# EAGLE board 9dof_block-Panel-v10 (EAGLE 6.6.0), part 1 of 4
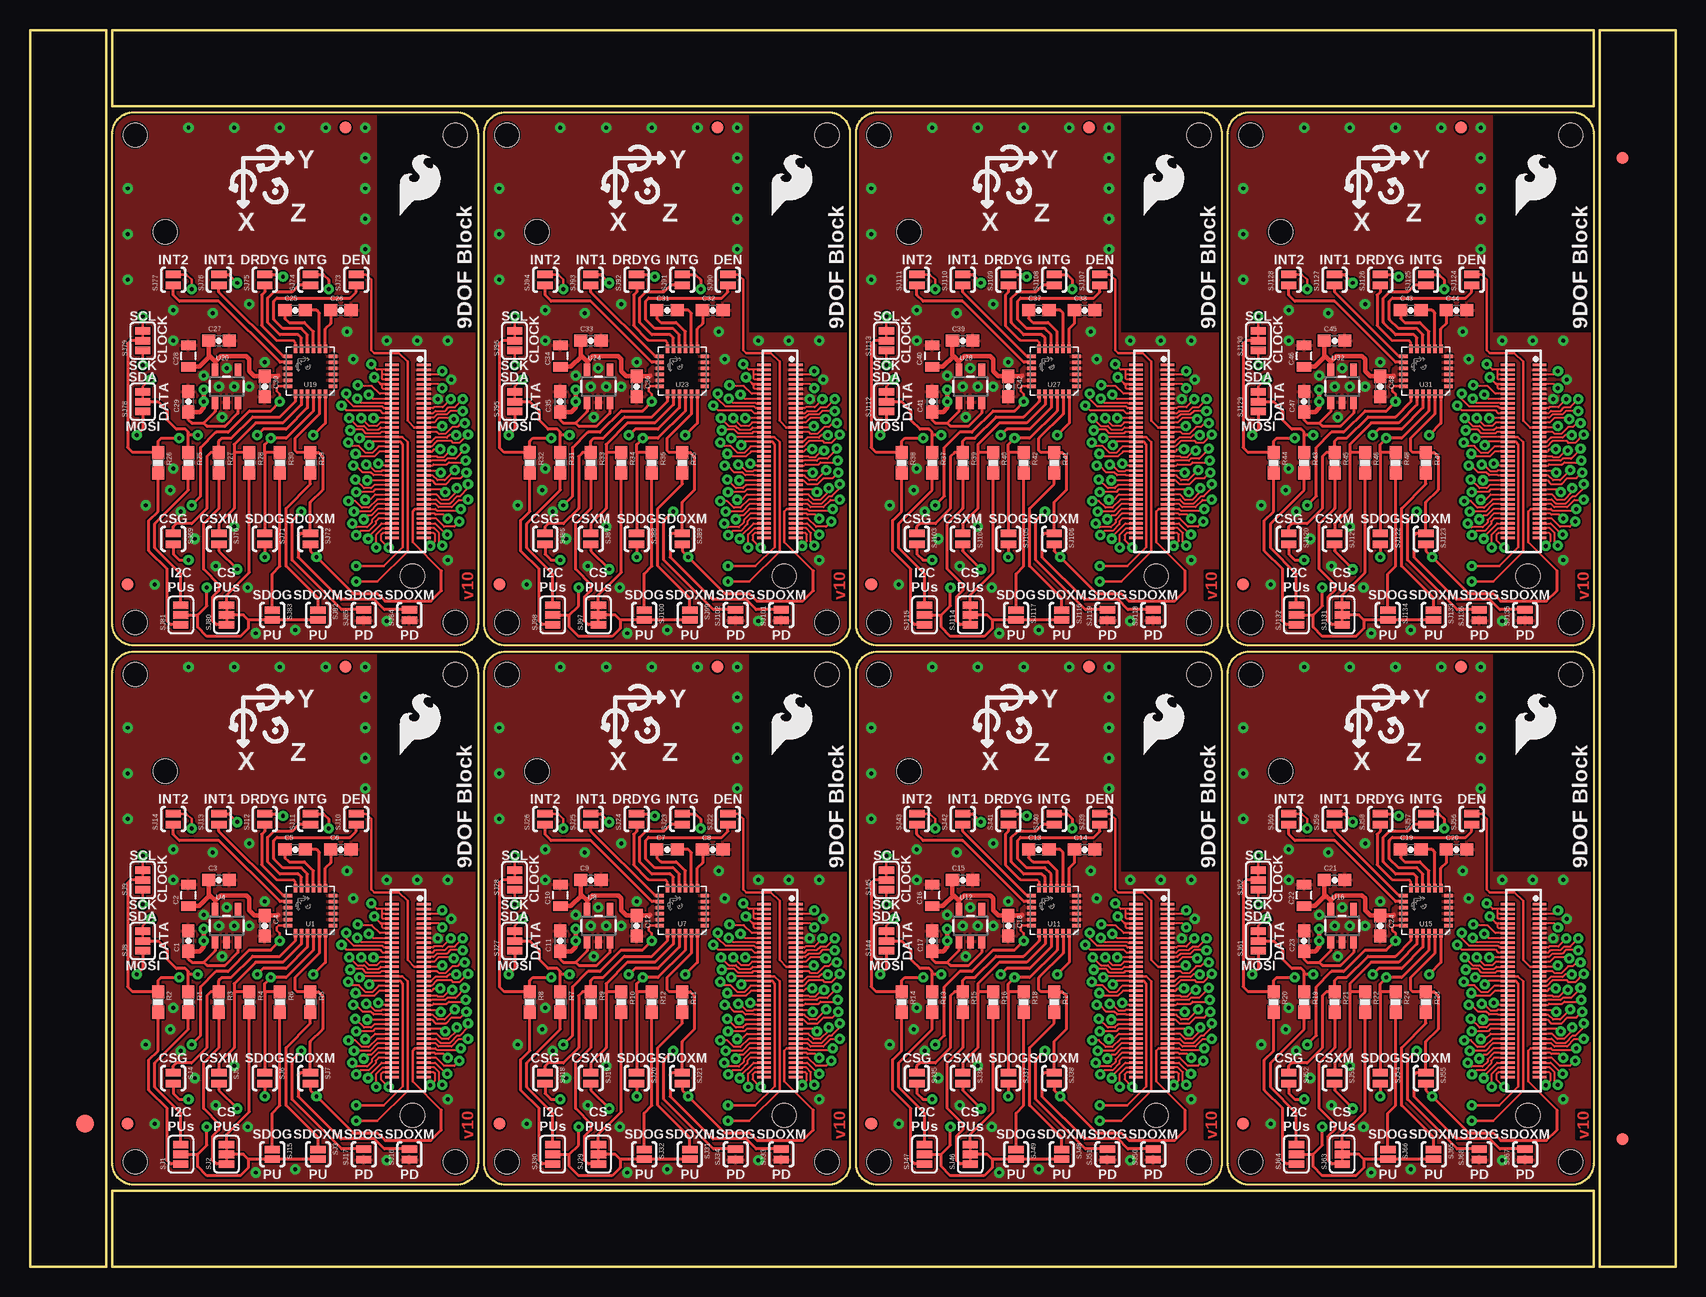
[diagram p0: board, top side]
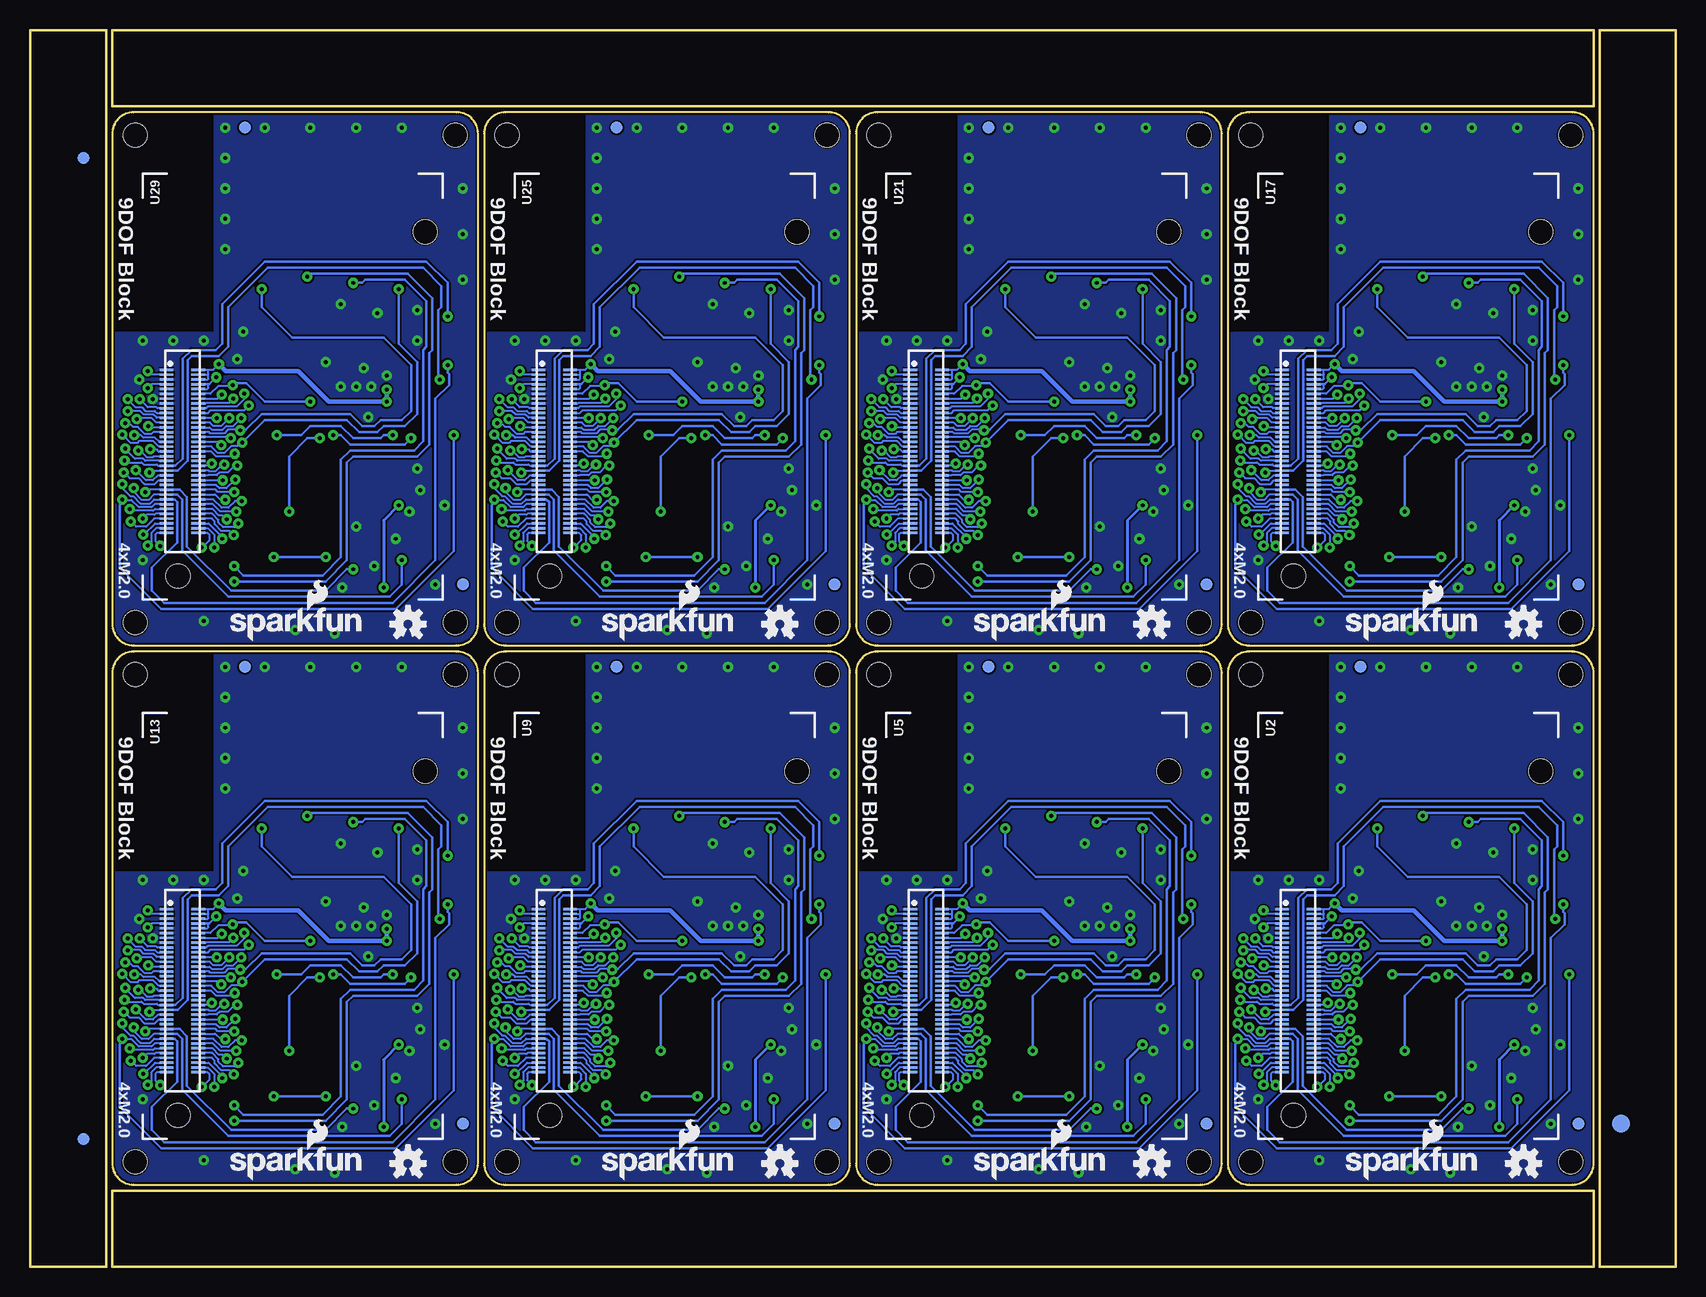
[diagram p1: board, bottom side, seen from below]

Size 137.16 x 103.12 mm. Coordinates in mm from the lower left corner, seen from the top.
Outline: 6.35,79.25 6.35,0 0,0 0,29.72
Outline: 137.16,79.25 137.16,0 130.81,0 130.81,29.72
Outline: 130.81,23.88 130.81,103.12 137.16,103.12 137.16,73.41
Outline: 0,23.88 0,103.12 6.35,103.12 6.35,73.41
Outline: 37.34,49.53 37.34,8.64 arc-90 35.56,6.86 8.64,6.86 arc-90 6.86,8.64 6.86,49.53 arc-90 8.64,51.31 35.56,51.31 arc-90 37.34,49.53
Outline: 68.33,49.53 68.33,8.64 arc-90 66.55,6.86 39.62,6.86 arc-90 37.85,8.64 37.85,49.53 arc-90 39.62,51.31 66.55,51.31 arc-90 68.33,49.53
Outline: 99.31,49.53 99.31,8.64 arc-90 97.54,6.86 70.61,6.86 arc-90 68.83,8.64 68.83,49.53 arc-90 70.61,51.31 97.54,51.31 arc-90 99.31,49.53
Outline: 130.3,49.53 130.3,8.64 arc-90 128.52,6.86 101.6,6.86 arc-90 99.82,8.64 99.82,49.53 arc-90 101.6,51.31 128.52,51.31 arc-90 130.3,49.53
Outline: 37.34,94.49 37.34,53.59 arc-90 35.56,51.82 8.64,51.82 arc-90 6.86,53.59 6.86,94.49 arc-90 8.64,96.27 35.56,96.27 arc-90 37.34,94.49
Outline: 68.33,94.49 68.33,53.59 arc-90 66.55,51.82 39.62,51.82 arc-90 37.85,53.59 37.85,94.49 arc-90 39.62,96.27 66.55,96.27 arc-90 68.33,94.49
Outline: 99.31,94.49 99.31,53.59 arc-90 97.54,51.82 70.61,51.82 arc-90 68.83,53.59 68.83,94.49 arc-90 70.61,96.27 97.54,96.27 arc-90 99.31,94.49
Outline: 130.3,94.49 130.3,53.59 arc-90 128.52,51.82 101.6,51.82 arc-90 99.82,53.59 99.82,94.49 arc-90 101.6,96.27 128.52,96.27 arc-90 130.3,94.49
Outline: 6.86,0 130.3,0 130.3,6.35 6.86,6.35 6.86,0
Outline: 130.3,103.12 6.86,103.12 6.86,96.77 130.3,96.77 130.3,103.12
Copper layers (1*16): Top 0.035mm / dielectric 1.5mm / Bottom 0.035mm
Design rules "SparkFun-2-layer *": minimum track width 6mil, minimum drill 13mil, track to track 6mil, track to pad 6mil, pad to pad 6mil, via to via 6mil, smd to smd 6mil, copper to edge 6mil, drill to drill 6mil, minimum pad ring 12mil, minimum via ring 10mil, stop-mask expansion 4mil, vias tented up to drill 20mil, thermal gap 6mil
Holes 2 mm at 35.43,8.76 8.76,8.76 8.76,49.4 35.43,49.4 66.42,8.76 39.75,8.76 39.75,49.4 66.42,49.4 97.41,8.76 70.74,8.76 70.74,49.4 97.41,49.4 128.4,8.76 101.73,8.76 101.73,49.4 128.4,49.4 35.43,53.72 8.76,53.72 8.76,94.36 35.43,94.36 66.42,53.72 39.75,53.72 39.75,94.36 66.42,94.36 97.41,53.72 70.74,53.72 70.74,94.36 97.41,94.36 128.4,53.72 101.73,53.72 101.73,94.36 128.4,94.36
tRestrict: area 29,33 to 37.3,51.3; area 22.1,28.4 to 24.6,31; area 59.9,33 to 68.3,51.3; area 53.1,28.4 to 55.6,31; area 90.9,33 to 99.3,51.3; area 84.1,28.4 to 86.6,31; area 121.9,33 to 130.3,51.3; area 115.1,28.4 to 117.6,31; area 29,78 to 37.3,96.3; area 22.1,73.4 to 24.6,75.9; area 59.9,78 to 68.3,96.3; area 53.1,73.4 to 55.6,75.9; area 90.9,78 to 99.3,96.3; area 84.1,73.4 to 86.6,75.9; area 121.9,78 to 130.3,96.3; area 115.1,73.4 to 117.6,75.9; 56 lines
bRestrict: area 29,33 to 37.3,51.3; area 59.9,33 to 68.3,51.3; area 90.9,33 to 99.3,51.3; area 121.9,33 to 130.3,51.3; area 29,78 to 37.3,96.3; area 59.9,78 to 68.3,96.3; area 90.9,78 to 99.3,96.3; area 121.9,78 to 130.3,96.3

## Footprints (pad centres in the part's own frame; a part is rotated, then mirrored left to right if it is on the bottom)
0603-CAP = smd 1.1 x 1: 1 -0.85,0; 2 0.85,0
0805 = smd 0.8 x 1.2: 1 -0.9,0; 2 0.9,0
FIDUCIAL-1.5X3 = smd 1.5 x 1.5: 1 0,0
FIDUCIAL-1X2 = smd 1 x 1: 1 0,0
0603-RES = smd 1.1 x 1: 1 -0.85,0; 2 0.85,0
PAD-JUMPER-3-NO_YES_SILK = smd 0.635 x 1.27: 1 -0.813,0; 2 0,0; 3 0.813,0
PAD-JUMPER-3-3OF3_NC_BY_TRACE_YES_SILK_FULL_BOX = smd 0.635 x 1.27: 1 -0.813,0; 2 0,0; 3 0.813,0
PAD-JUMPER-2-NC_BY_PASTE_YES_SILK = smd 0.635 x 1.27: 1 -0.401,0; 2 0.413,0
PAD-JUMPER-2-NO_YES_SILK = smd 0.635 x 1.27: 1 -0.45,0; 2 0.45,0
PAD-JUMPER-3-2OF3_NC_BY_TRACE_YES_SILK_FULL_BOX = smd 0.635 x 1.27: 1 -0.813,0; 2 0,0; 3 0.813,0
LGA-24 = smd 0.7 x 0.29: 1 -1.875,1.25; 2 -1.875,0.75; 3 -1.875,0.25; 4 -1.875,-0.25; 5 -1.875,-0.75; 6 -1.875,-1.25; 13 1.875,-1.25; 14 1.875,-0.75; 15 1.875,-0.25; 16 1.875,0.25; 17 1.875,0.75; 18 1.875,1.25 | smd 0.29 x 0.7: 7 -1.25,-1.875; 8 -0.75,-1.875; 9 -0.25,-1.875; 10 0.25,-1.875; 11 0.75,-1.875; 12 1.25,-1.875; 19 1.25,1.875; 20 0.75,1.875; 21 0.25,1.875; 22 -0.25,1.875; 23 -0.75,1.875; 24 -1.25,1.875
EDISON_DAUGHTER = smd 1.14 x 0.2: 1 1.98,19.17; 2 4.62,19.17; 3 1.98,18.77; 4 4.62,18.77; 5 1.98,18.37; 6 4.62,18.37; 7 1.98,17.97; 8 4.62,17.97; 9 1.98,17.57; 10 4.62,17.57; 11 1.98,17.17; 12 4.62,17.17; 13 1.98,16.77; 14 4.62,16.77; 15 1.98,16.37; 16 4.62,16.37; 17 1.98,15.97; 18 4.62,15.97; 19 1.98,15.57; 20 4.62,15.57; 21 1.98,15.17; 22 4.62,15.17; 23 1.98,14.77; 24 4.62,14.77; 25 1.98,14.37; 26 4.62,14.37; 27 1.98,13.97; 28 4.62,13.97; 29 1.98,13.57; 30 4.62,13.57; 31 1.98,13.17; 32 4.62,13.17; 33 1.98,12.77; 34 4.62,12.77; 35 1.98,12.37; 36 4.62,12.37; 37 1.98,11.97; 38 4.62,11.97; 39 1.98,11.57; 40 4.62,11.57; 41 1.98,11.17; 42 4.62,11.17; 43 1.98,10.77; 44 4.62,10.77; 45 1.98,10.37; 46 4.62,10.37; 47 1.98,9.97; 48 4.62,9.97; 49 1.98,9.57; 50 4.62,9.57; 51 1.98,9.17; 52 4.62,9.17; 53 1.98,8.77; 54 4.62,8.77; 55 1.98,8.37; 56 4.62,8.37; 57 1.98,7.97; 58 4.62,7.97; 59 1.98,7.57; 60 4.62,7.57; 61 1.98,7.17; 62 4.62,7.17; 63 1.98,6.77; 64 4.62,6.77; 65 1.98,6.37; 66 4.62,6.37; 67 1.98,5.97; 68 4.62,5.97; 69 1.98,5.57; 70 4.62,5.57 | hole 2: 23.53,30.67; 2.93,1.98
DF40C-70DP-0.4(51) = smd 0.2 x 1.14 bottom: 1 6.8,1.32; 2 6.8,-1.32; 3 6.4,1.32; 4 6.4,-1.32; 5 6,1.32; 6 6,-1.32; 7 5.6,1.32; 8 5.6,-1.32; 9 5.2,1.32; 10 5.2,-1.32; 11 4.8,1.32; 12 4.8,-1.32; 13 4.4,1.32; 14 4.4,-1.32; 15 4,1.32; 16 4,-1.32; 17 3.6,1.32; 18 3.6,-1.32; 19 3.2,1.32; 20 3.2,-1.32; 21 2.8,1.32; 22 2.8,-1.32; 23 2.4,1.32; 24 2.4,-1.32; 25 2,1.32; 26 2,-1.32; 27 1.6,1.32; 28 1.6,-1.32; 29 1.2,1.32; 30 1.2,-1.32; 31 0.8,1.32; 32 0.8,-1.32; 33 0.4,1.32; 34 0.4,-1.32; 35 0,1.32; 36 0,-1.32; 37 -0.4,1.32; 38 -0.4,-1.32; 39 -0.8,1.32; 40 -0.8,-1.32; 41 -1.2,1.32; 42 -1.2,-1.32; 43 -1.6,1.32; 44 -1.6,-1.32; 45 -2,1.32; 46 -2,-1.32; 47 -2.4,1.32; 48 -2.4,-1.32; 49 -2.8,1.32; 50 -2.8,-1.32; 51 -3.2,1.32; 52 -3.2,-1.32; 53 -3.6,1.32; 54 -3.6,-1.32; 55 -4,1.32; 56 -4,-1.32; 57 -4.4,1.32; 58 -4.4,-1.32; 59 -4.8,1.32; 60 -4.8,-1.32; 61 -5.2,1.32; 62 -5.2,-1.32; 63 -5.6,1.32; 64 -5.6,-1.32; 65 -6,1.32; 66 -6,-1.32; 67 -6.4,1.32; 68 -6.4,-1.32; 69 -6.8,1.32; 70 -6.8,-1.32; NC1 7.2,1.32; NC2 7.2,-1.32; NC3 -7.2,-1.32; NC4 -7.2,1.32
SOT23-5 = smd 0.55 x 1.2: 1 -0.95,-1.3; 2 0,-1.3; 3 0.95,-1.3; 4 0.95,1.3; 5 -0.95,1.3

## Placement (x,y rotation side)
C1  1.0uF  [0603-CAP]  13.21,27.18 90 top
C2  10uF  [0805]  13.21,30.99 90 top
C3  1.0uF  [0603-CAP]  15.75,32.26 0 top
C4  0.1uF  [0603-CAP]  19.56,28.45 270 top
C5  0.22uF  [0603-CAP]  22.1,34.8 0 top
C6  4.7uF  [0603-CAP]  25.91,34.8 0 top
C7  0.22uF  [0603-CAP]  53.09,34.8 0 top
C8  4.7uF  [0603-CAP]  56.9,34.8 0 top
C9  1.0uF  [0603-CAP]  46.74,32.26 0 top
C10  10uF  [0805]  44.2,30.99 90 top
C11  1.0uF  [0603-CAP]  44.2,27.18 90 top
C12  0.1uF  [0603-CAP]  50.55,28.45 270 top
C13  0.22uF  [0603-CAP]  84.07,34.8 0 top
C14  4.7uF  [0603-CAP]  87.88,34.8 0 top
C15  1.0uF  [0603-CAP]  77.72,32.26 0 top
C16  10uF  [0805]  75.18,30.99 90 top
C17  1.0uF  [0603-CAP]  75.18,27.18 90 top
C18  0.1uF  [0603-CAP]  81.53,28.45 270 top
C19  0.22uF  [0603-CAP]  115.06,34.8 0 top
C20  4.7uF  [0603-CAP]  118.87,34.8 0 top
C21  1.0uF  [0603-CAP]  108.71,32.26 0 top
C22  10uF  [0805]  106.17,30.99 90 top
C23  1.0uF  [0603-CAP]  106.17,27.18 90 top
C24  0.1uF  [0603-CAP]  112.52,28.45 270 top
C25  0.22uF  [0603-CAP]  22.1,79.76 0 top
C26  4.7uF  [0603-CAP]  25.91,79.76 0 top
C27  1.0uF  [0603-CAP]  15.75,77.22 0 top
C28  10uF  [0805]  13.21,75.95 90 top
C29  1.0uF  [0603-CAP]  13.21,72.14 90 top
C30  0.1uF  [0603-CAP]  19.56,73.41 270 top
C31  0.22uF  [0603-CAP]  53.09,79.76 0 top
C32  4.7uF  [0603-CAP]  56.9,79.76 0 top
C33  1.0uF  [0603-CAP]  46.74,77.22 0 top
C34  10uF  [0805]  44.2,75.95 90 top
C35  1.0uF  [0603-CAP]  44.2,72.14 90 top
C36  0.1uF  [0603-CAP]  50.55,73.41 270 top
C37  0.22uF  [0603-CAP]  84.07,79.76 0 top
C38  4.7uF  [0603-CAP]  87.88,79.76 0 top
C39  1.0uF  [0603-CAP]  77.72,77.22 0 top
C40  10uF  [0805]  75.18,75.95 90 top
C41  1.0uF  [0603-CAP]  75.18,72.14 90 top
C42  0.1uF  [0603-CAP]  81.53,73.41 270 top
C43  0.22uF  [0603-CAP]  115.06,79.76 0 top
C44  4.7uF  [0603-CAP]  118.87,79.76 0 top
C45  1.0uF  [0603-CAP]  108.71,77.22 0 top
C46  10uF  [0805]  106.17,75.95 90 top
C47  1.0uF  [0603-CAP]  106.17,72.14 90 top
C48  0.1uF  [0603-CAP]  112.52,73.41 270 top
E$1  [FIDUCIAL-1.5X3]  4.57,11.94 0 top
E$2  [FIDUCIAL-1.5X3]  4.57,11.94 0 bottom
E$3  [FIDUCIAL-1X2]  132.72,92.46 180 bottom
E$4  [FIDUCIAL-1X2]  132.72,10.67 0 top
E$5  [FIDUCIAL-1X2]  132.72,92.46 180 top
E$6  [FIDUCIAL-1X2]  132.72,10.67 0 bottom
FID1  FIDUCIAL1X2  [FIDUCIAL-1X2]  8.13,11.94 0 top
FID2  FIDUCIAL1X2  [FIDUCIAL-1X2]  26.29,50.04 0 top
FID3  FIDUCIAL1X2  [FIDUCIAL-1X2]  26.29,50.04 0 bottom
FID4  FIDUCIAL1X2  [FIDUCIAL-1X2]  8.13,11.94 0 bottom
FID5  FIDUCIAL1X2  [FIDUCIAL-1X2]  39.12,11.94 0 top
FID6  FIDUCIAL1X2  [FIDUCIAL-1X2]  57.28,50.04 0 top
FID7  FIDUCIAL1X2  [FIDUCIAL-1X2]  57.28,50.04 0 bottom
FID8  FIDUCIAL1X2  [FIDUCIAL-1X2]  39.12,11.94 0 bottom
FID9  FIDUCIAL1X2  [FIDUCIAL-1X2]  70.1,11.94 0 top
FID10  FIDUCIAL1X2  [FIDUCIAL-1X2]  88.27,50.04 0 top
FID11  FIDUCIAL1X2  [FIDUCIAL-1X2]  88.27,50.04 0 bottom
FID12  FIDUCIAL1X2  [FIDUCIAL-1X2]  70.1,11.94 0 bottom
FID13  FIDUCIAL1X2  [FIDUCIAL-1X2]  101.09,11.94 0 top
FID14  FIDUCIAL1X2  [FIDUCIAL-1X2]  119.25,50.04 0 top
FID15  FIDUCIAL1X2  [FIDUCIAL-1X2]  119.25,50.04 0 bottom
FID16  FIDUCIAL1X2  [FIDUCIAL-1X2]  101.09,11.94 0 bottom
FID17  FIDUCIAL1X2  [FIDUCIAL-1X2]  8.13,56.9 0 top
FID18  FIDUCIAL1X2  [FIDUCIAL-1X2]  26.29,95 0 top
FID19  FIDUCIAL1X2  [FIDUCIAL-1X2]  26.29,95 0 bottom
FID20  FIDUCIAL1X2  [FIDUCIAL-1X2]  8.13,56.9 0 bottom
FID21  FIDUCIAL1X2  [FIDUCIAL-1X2]  39.12,56.9 0 top
FID22  FIDUCIAL1X2  [FIDUCIAL-1X2]  57.28,95 0 top
FID23  FIDUCIAL1X2  [FIDUCIAL-1X2]  57.28,95 0 bottom
FID24  FIDUCIAL1X2  [FIDUCIAL-1X2]  39.12,56.9 0 bottom
FID25  FIDUCIAL1X2  [FIDUCIAL-1X2]  70.1,56.9 0 top
FID26  FIDUCIAL1X2  [FIDUCIAL-1X2]  88.27,95 0 top
FID27  FIDUCIAL1X2  [FIDUCIAL-1X2]  88.27,95 0 bottom
FID28  FIDUCIAL1X2  [FIDUCIAL-1X2]  70.1,56.9 0 bottom
FID29  FIDUCIAL1X2  [FIDUCIAL-1X2]  101.09,56.9 0 top
FID30  FIDUCIAL1X2  [FIDUCIAL-1X2]  119.25,95 0 top
FID31  FIDUCIAL1X2  [FIDUCIAL-1X2]  119.25,95 0 bottom
FID32  FIDUCIAL1X2  [FIDUCIAL-1X2]  101.09,56.9 0 bottom
LOGO1  SFE_LOGO_FLAME.2_INCH  [SFE_LOGO_FLAME_.2]  30.48,42.42 0 top
LOGO2  OSHW-LOGOS  [OSHW-LOGO-S]  12.7,8.64 0 bottom
LOGO3  SFE_LOGO_NAME_FLAME.1_INCH  [SFE_LOGO_NAME_FLAME_.1]  27.94,7.11 0 bottom
LOGO4  OSHW-LOGOS  [OSHW-LOGO-S]  43.69,8.64 0 bottom
LOGO5  SFE_LOGO_NAME_FLAME.1_INCH  [SFE_LOGO_NAME_FLAME_.1]  58.93,7.11 0 bottom
LOGO6  SFE_LOGO_FLAME.2_INCH  [SFE_LOGO_FLAME_.2]  61.47,42.42 0 top
LOGO7  OSHW-LOGOS  [OSHW-LOGO-S]  74.68,8.64 0 bottom
LOGO8  SFE_LOGO_NAME_FLAME.1_INCH  [SFE_LOGO_NAME_FLAME_.1]  89.92,7.11 0 bottom
LOGO9  SFE_LOGO_FLAME.2_INCH  [SFE_LOGO_FLAME_.2]  92.46,42.42 0 top
LOGO10  OSHW-LOGOS  [OSHW-LOGO-S]  105.66,8.64 0 bottom
LOGO11  SFE_LOGO_NAME_FLAME.1_INCH  [SFE_LOGO_NAME_FLAME_.1]  120.9,7.11 0 bottom
LOGO12  SFE_LOGO_FLAME.2_INCH  [SFE_LOGO_FLAME_.2]  123.44,42.42 0 top
LOGO13  OSHW-LOGOS  [OSHW-LOGO-S]  12.7,53.59 0 bottom
LOGO14  SFE_LOGO_NAME_FLAME.1_INCH  [SFE_LOGO_NAME_FLAME_.1]  27.94,52.07 0 bottom
LOGO15  SFE_LOGO_FLAME.2_INCH  [SFE_LOGO_FLAME_.2]  30.48,87.38 0 top
LOGO16  OSHW-LOGOS  [OSHW-LOGO-S]  43.69,53.59 0 bottom
LOGO17  SFE_LOGO_NAME_FLAME.1_INCH  [SFE_LOGO_NAME_FLAME_.1]  58.93,52.07 0 bottom
LOGO18  SFE_LOGO_FLAME.2_INCH  [SFE_LOGO_FLAME_.2]  61.47,87.38 0 top
LOGO19  OSHW-LOGOS  [OSHW-LOGO-S]  74.68,53.59 0 bottom
LOGO20  SFE_LOGO_NAME_FLAME.1_INCH  [SFE_LOGO_NAME_FLAME_.1]  89.92,52.07 0 bottom
LOGO21  SFE_LOGO_FLAME.2_INCH  [SFE_LOGO_FLAME_.2]  92.46,87.38 0 top
LOGO22  OSHW-LOGOS  [OSHW-LOGO-S]  105.66,53.59 0 bottom
LOGO23  SFE_LOGO_NAME_FLAME.1_INCH  [SFE_LOGO_NAME_FLAME_.1]  120.9,52.07 0 bottom
LOGO24  SFE_LOGO_FLAME.2_INCH  [SFE_LOGO_FLAME_.2]  123.44,87.38 0 top
R1  10K  [0603-RES]  13.21,22.1 270 top
R2  10K  [0603-RES]  10.67,22.1 270 top
R3  10k  [0603-RES]  15.75,22.1 270 top
R4  10k  [0603-RES]  18.29,22.1 270 top
R5  10k  [0603-RES]  23.37,22.1 270 top
R6  10k  [0603-RES]  20.83,22.1 270 top
R7  10K  [0603-RES]  44.2,22.1 270 top
R8  10K  [0603-RES]  41.66,22.1 270 top
R9  10k  [0603-RES]  46.74,22.1 270 top
R10  10k  [0603-RES]  49.28,22.1 270 top
R11  10k  [0603-RES]  54.36,22.1 270 top
R12  10k  [0603-RES]  51.82,22.1 270 top
R13  10K  [0603-RES]  75.18,22.1 270 top
R14  10K  [0603-RES]  72.64,22.1 270 top
R15  10k  [0603-RES]  77.72,22.1 270 top
R16  10k  [0603-RES]  80.26,22.1 270 top
R17  10k  [0603-RES]  85.34,22.1 270 top
R18  10k  [0603-RES]  82.8,22.1 270 top
R19  10K  [0603-RES]  106.17,22.1 270 top
R20  10K  [0603-RES]  103.63,22.1 270 top
R21  10k  [0603-RES]  108.71,22.1 270 top
R22  10k  [0603-RES]  111.25,22.1 270 top
R23  10k  [0603-RES]  116.33,22.1 270 top
R24  10k  [0603-RES]  113.79,22.1 270 top
R25  10K  [0603-RES]  13.21,67.06 270 top
R26  10K  [0603-RES]  10.67,67.06 270 top
R27  10k  [0603-RES]  15.75,67.06 270 top
R28  10k  [0603-RES]  18.29,67.06 270 top
R29  10k  [0603-RES]  23.37,67.06 270 top
R30  10k  [0603-RES]  20.83,67.06 270 top
R31  10K  [0603-RES]  44.2,67.06 270 top
R32  10K  [0603-RES]  41.66,67.06 270 top
R33  10k  [0603-RES]  46.74,67.06 270 top
R34  10k  [0603-RES]  49.28,67.06 270 top
R35  10k  [0603-RES]  54.36,67.06 270 top
R36  10k  [0603-RES]  51.82,67.06 270 top
R37  10K  [0603-RES]  75.18,67.06 270 top
R38  10K  [0603-RES]  72.64,67.06 270 top
R39  10k  [0603-RES]  77.72,67.06 270 top
R40  10k  [0603-RES]  80.26,67.06 270 top
R41  10k  [0603-RES]  85.34,67.06 270 top
R42  10k  [0603-RES]  82.8,67.06 270 top
R43  10K  [0603-RES]  106.17,67.06 270 top
R44  10K  [0603-RES]  103.63,67.06 270 top
R45  10k  [0603-RES]  108.71,67.06 270 top
R46  10k  [0603-RES]  111.25,67.06 270 top
R47  10k  [0603-RES]  116.33,67.06 270 top
R48  10k  [0603-RES]  113.79,67.06 270 top
SJ1  JUMPER-PAD-3-NOYES_SILK  [PAD-JUMPER-3-NO_YES_SILK]  12.57,9.4 90 top
SJ2  [PAD-JUMPER-3-3OF3_NC_BY_TRACE_YES_SILK_FULL_BOX]  16.38,9.4 90 top
SJ3  JUMPER-PAD-2-NC_BY_PASTE  [PAD-JUMPER-2-NC_BY_PASTE_YES_SILK]  24,9.4 270 top
SJ4  JUMPER-PAD-2-NOYES_SILK  [PAD-JUMPER-2-NO_YES_SILK]  11.94,15.75 270 top
SJ5  JUMPER-PAD-2-NOYES_SILK  [PAD-JUMPER-2-NO_YES_SILK]  15.75,15.75 270 top
SJ6  JUMPER-PAD-2-NOYES_SILK  [PAD-JUMPER-2-NO_YES_SILK]  19.56,15.75 270 top
SJ7  JUMPER-PAD-2-NOYES_SILK  [PAD-JUMPER-2-NO_YES_SILK]  23.37,15.75 270 top
SJ8  JUMPER-PAD-3-2OF3_NC_BY_TRACE_SMALL  [PAD-JUMPER-3-2OF3_NC_BY_TRACE_YES_SILK_FULL_BOX]  9.4,27.18 90 top
SJ9  JUMPER-PAD-3-2OF3_NC_BY_TRACE_SMALL  [PAD-JUMPER-3-2OF3_NC_BY_TRACE_YES_SILK_FULL_BOX]  9.4,32.26 90 top
SJ10  JUMPER-PAD-2-NOYES_SILK  [PAD-JUMPER-2-NO_YES_SILK]  27.18,37.34 90 top
SJ11  JUMPER-PAD-2-NOYES_SILK  [PAD-JUMPER-2-NO_YES_SILK]  23.37,37.34 90 top
SJ12  JUMPER-PAD-2-NOYES_SILK  [PAD-JUMPER-2-NO_YES_SILK]  19.56,37.34 90 top
SJ13  JUMPER-PAD-2-NOYES_SILK  [PAD-JUMPER-2-NO_YES_SILK]  15.75,37.34 90 top
SJ14  JUMPER-PAD-2-NOYES_SILK  [PAD-JUMPER-2-NO_YES_SILK]  11.94,37.34 90 top
SJ15  JUMPER-PAD-2-NC_BY_PASTE  [PAD-JUMPER-2-NC_BY_PASTE_YES_SILK]  20.19,9.4 270 top
SJ16  JUMPER-PAD-2-NOYES_SILK  [PAD-JUMPER-2-NO_YES_SILK]  31.62,9.4 90 top
SJ17  JUMPER-PAD-2-NOYES_SILK  [PAD-JUMPER-2-NO_YES_SILK]  27.81,9.4 90 top
SJ18  JUMPER-PAD-2-NOYES_SILK  [PAD-JUMPER-2-NO_YES_SILK]  42.93,15.75 270 top
SJ19  JUMPER-PAD-2-NOYES_SILK  [PAD-JUMPER-2-NO_YES_SILK]  46.74,15.75 270 top
SJ20  JUMPER-PAD-2-NOYES_SILK  [PAD-JUMPER-2-NO_YES_SILK]  50.55,15.75 270 top
SJ21  JUMPER-PAD-2-NOYES_SILK  [PAD-JUMPER-2-NO_YES_SILK]  54.36,15.75 270 top
SJ22  JUMPER-PAD-2-NOYES_SILK  [PAD-JUMPER-2-NO_YES_SILK]  58.17,37.34 90 top
SJ23  JUMPER-PAD-2-NOYES_SILK  [PAD-JUMPER-2-NO_YES_SILK]  54.36,37.34 90 top
SJ24  JUMPER-PAD-2-NOYES_SILK  [PAD-JUMPER-2-NO_YES_SILK]  50.55,37.34 90 top
SJ25  JUMPER-PAD-2-NOYES_SILK  [PAD-JUMPER-2-NO_YES_SILK]  46.74,37.34 90 top
SJ26  JUMPER-PAD-2-NOYES_SILK  [PAD-JUMPER-2-NO_YES_SILK]  42.93,37.34 90 top
SJ27  JUMPER-PAD-3-2OF3_NC_BY_TRACE_SMALL  [PAD-JUMPER-3-2OF3_NC_BY_TRACE_YES_SILK_FULL_BOX]  40.39,27.18 90 top
SJ28  JUMPER-PAD-3-2OF3_NC_BY_TRACE_SMALL  [PAD-JUMPER-3-2OF3_NC_BY_TRACE_YES_SILK_FULL_BOX]  40.39,32.26 90 top
SJ29  [PAD-JUMPER-3-3OF3_NC_BY_TRACE_YES_SILK_FULL_BOX]  47.37,9.4 90 top
SJ30  JUMPER-PAD-3-NOYES_SILK  [PAD-JUMPER-3-NO_YES_SILK]  43.56,9.4 90 top
SJ31  JUMPER-PAD-2-NC_BY_PASTE  [PAD-JUMPER-2-NC_BY_PASTE_YES_SILK]  54.99,9.4 270 top
SJ32  JUMPER-PAD-2-NC_BY_PASTE  [PAD-JUMPER-2-NC_BY_PASTE_YES_SILK]  51.18,9.4 270 top
SJ33  JUMPER-PAD-2-NOYES_SILK  [PAD-JUMPER-2-NO_YES_SILK]  62.61,9.4 90 top
SJ34  JUMPER-PAD-2-NOYES_SILK  [PAD-JUMPER-2-NO_YES_SILK]  58.8,9.4 90 top
SJ35  JUMPER-PAD-2-NOYES_SILK  [PAD-JUMPER-2-NO_YES_SILK]  73.91,15.75 270 top
SJ36  JUMPER-PAD-2-NOYES_SILK  [PAD-JUMPER-2-NO_YES_SILK]  77.72,15.75 270 top
SJ37  JUMPER-PAD-2-NOYES_SILK  [PAD-JUMPER-2-NO_YES_SILK]  81.53,15.75 270 top
SJ38  JUMPER-PAD-2-NOYES_SILK  [PAD-JUMPER-2-NO_YES_SILK]  85.34,15.75 270 top
SJ39  JUMPER-PAD-2-NOYES_SILK  [PAD-JUMPER-2-NO_YES_SILK]  89.15,37.34 90 top
SJ40  JUMPER-PAD-2-NOYES_SILK  [PAD-JUMPER-2-NO_YES_SILK]  85.34,37.34 90 top
SJ41  JUMPER-PAD-2-NOYES_SILK  [PAD-JUMPER-2-NO_YES_SILK]  81.53,37.34 90 top
SJ42  JUMPER-PAD-2-NOYES_SILK  [PAD-JUMPER-2-NO_YES_SILK]  77.72,37.34 90 top
SJ43  JUMPER-PAD-2-NOYES_SILK  [PAD-JUMPER-2-NO_YES_SILK]  73.91,37.34 90 top
SJ44  JUMPER-PAD-3-2OF3_NC_BY_TRACE_SMALL  [PAD-JUMPER-3-2OF3_NC_BY_TRACE_YES_SILK_FULL_BOX]  71.37,27.18 90 top
SJ45  JUMPER-PAD-3-2OF3_NC_BY_TRACE_SMALL  [PAD-JUMPER-3-2OF3_NC_BY_TRACE_YES_SILK_FULL_BOX]  71.37,32.26 90 top
SJ46  [PAD-JUMPER-3-3OF3_NC_BY_TRACE_YES_SILK_FULL_BOX]  78.36,9.4 90 top
SJ47  JUMPER-PAD-3-NOYES_SILK  [PAD-JUMPER-3-NO_YES_SILK]  74.55,9.4 90 top
SJ48  JUMPER-PAD-2-NC_BY_PASTE  [PAD-JUMPER-2-NC_BY_PASTE_YES_SILK]  85.98,9.4 270 top
SJ49  JUMPER-PAD-2-NC_BY_PASTE  [PAD-JUMPER-2-NC_BY_PASTE_YES_SILK]  82.17,9.4 270 top
SJ50  JUMPER-PAD-2-NOYES_SILK  [PAD-JUMPER-2-NO_YES_SILK]  93.6,9.4 90 top
SJ51  JUMPER-PAD-2-NOYES_SILK  [PAD-JUMPER-2-NO_YES_SILK]  89.79,9.4 90 top
SJ52  JUMPER-PAD-2-NOYES_SILK  [PAD-JUMPER-2-NO_YES_SILK]  104.9,15.75 270 top
SJ53  JUMPER-PAD-2-NOYES_SILK  [PAD-JUMPER-2-NO_YES_SILK]  108.71,15.75 270 top
SJ54  JUMPER-PAD-2-NOYES_SILK  [PAD-JUMPER-2-NO_YES_SILK]  112.52,15.75 270 top
SJ55  JUMPER-PAD-2-NOYES_SILK  [PAD-JUMPER-2-NO_YES_SILK]  116.33,15.75 270 top
SJ56  JUMPER-PAD-2-NOYES_SILK  [PAD-JUMPER-2-NO_YES_SILK]  120.14,37.34 90 top
SJ57  JUMPER-PAD-2-NOYES_SILK  [PAD-JUMPER-2-NO_YES_SILK]  116.33,37.34 90 top
SJ58  JUMPER-PAD-2-NOYES_SILK  [PAD-JUMPER-2-NO_YES_SILK]  112.52,37.34 90 top
SJ59  JUMPER-PAD-2-NOYES_SILK  [PAD-JUMPER-2-NO_YES_SILK]  108.71,37.34 90 top
SJ60  JUMPER-PAD-2-NOYES_SILK  [PAD-JUMPER-2-NO_YES_SILK]  104.9,37.34 90 top
SJ61  JUMPER-PAD-3-2OF3_NC_BY_TRACE_SMALL  [PAD-JUMPER-3-2OF3_NC_BY_TRACE_YES_SILK_FULL_BOX]  102.36,27.18 90 top
SJ62  JUMPER-PAD-3-2OF3_NC_BY_TRACE_SMALL  [PAD-JUMPER-3-2OF3_NC_BY_TRACE_YES_SILK_FULL_BOX]  102.36,32.26 90 top
SJ63  [PAD-JUMPER-3-3OF3_NC_BY_TRACE_YES_SILK_FULL_BOX]  109.35,9.4 90 top
SJ64  JUMPER-PAD-3-NOYES_SILK  [PAD-JUMPER-3-NO_YES_SILK]  105.54,9.4 90 top
SJ65  JUMPER-PAD-2-NC_BY_PASTE  [PAD-JUMPER-2-NC_BY_PASTE_YES_SILK]  116.97,9.4 270 top
SJ66  JUMPER-PAD-2-NC_BY_PASTE  [PAD-JUMPER-2-NC_BY_PASTE_YES_SILK]  113.16,9.4 270 top
SJ67  JUMPER-PAD-2-NOYES_SILK  [PAD-JUMPER-2-NO_YES_SILK]  124.59,9.4 90 top
SJ68  JUMPER-PAD-2-NOYES_SILK  [PAD-JUMPER-2-NO_YES_SILK]  120.78,9.4 90 top
SJ69  JUMPER-PAD-2-NOYES_SILK  [PAD-JUMPER-2-NO_YES_SILK]  11.94,60.71 270 top
SJ70  JUMPER-PAD-2-NOYES_SILK  [PAD-JUMPER-2-NO_YES_SILK]  15.75,60.71 270 top
SJ71  JUMPER-PAD-2-NOYES_SILK  [PAD-JUMPER-2-NO_YES_SILK]  19.56,60.71 270 top
SJ72  JUMPER-PAD-2-NOYES_SILK  [PAD-JUMPER-2-NO_YES_SILK]  23.37,60.71 270 top
SJ73  JUMPER-PAD-2-NOYES_SILK  [PAD-JUMPER-2-NO_YES_SILK]  27.18,82.3 90 top
SJ74  JUMPER-PAD-2-NOYES_SILK  [PAD-JUMPER-2-NO_YES_SILK]  23.37,82.3 90 top
SJ75  JUMPER-PAD-2-NOYES_SILK  [PAD-JUMPER-2-NO_YES_SILK]  19.56,82.3 90 top
SJ76  JUMPER-PAD-2-NOYES_SILK  [PAD-JUMPER-2-NO_YES_SILK]  15.75,82.3 90 top
SJ77  JUMPER-PAD-2-NOYES_SILK  [PAD-JUMPER-2-NO_YES_SILK]  11.94,82.3 90 top
SJ78  JUMPER-PAD-3-2OF3_NC_BY_TRACE_SMALL  [PAD-JUMPER-3-2OF3_NC_BY_TRACE_YES_SILK_FULL_BOX]  9.4,72.14 90 top
SJ79  JUMPER-PAD-3-2OF3_NC_BY_TRACE_SMALL  [PAD-JUMPER-3-2OF3_NC_BY_TRACE_YES_SILK_FULL_BOX]  9.4,77.22 90 top
SJ80  [PAD-JUMPER-3-3OF3_NC_BY_TRACE_YES_SILK_FULL_BOX]  16.38,54.36 90 top
SJ81  JUMPER-PAD-3-NOYES_SILK  [PAD-JUMPER-3-NO_YES_SILK]  12.57,54.36 90 top
SJ82  JUMPER-PAD-2-NC_BY_PASTE  [PAD-JUMPER-2-NC_BY_PASTE_YES_SILK]  24,54.36 270 top
SJ83  JUMPER-PAD-2-NC_BY_PASTE  [PAD-JUMPER-2-NC_BY_PASTE_YES_SILK]  20.19,54.36 270 top
SJ84  JUMPER-PAD-2-NOYES_SILK  [PAD-JUMPER-2-NO_YES_SILK]  31.62,54.36 90 top
SJ85  JUMPER-PAD-2-NOYES_SILK  [PAD-JUMPER-2-NO_YES_SILK]  27.81,54.36 90 top
SJ86  JUMPER-PAD-2-NOYES_SILK  [PAD-JUMPER-2-NO_YES_SILK]  42.93,60.71 270 top
SJ87  JUMPER-PAD-2-NOYES_SILK  [PAD-JUMPER-2-NO_YES_SILK]  46.74,60.71 270 top
SJ88  JUMPER-PAD-2-NOYES_SILK  [PAD-JUMPER-2-NO_YES_SILK]  50.55,60.71 270 top
SJ89  JUMPER-PAD-2-NOYES_SILK  [PAD-JUMPER-2-NO_YES_SILK]  54.36,60.71 270 top
SJ90  JUMPER-PAD-2-NOYES_SILK  [PAD-JUMPER-2-NO_YES_SILK]  58.17,82.3 90 top
SJ91  JUMPER-PAD-2-NOYES_SILK  [PAD-JUMPER-2-NO_YES_SILK]  54.36,82.3 90 top
SJ92  JUMPER-PAD-2-NOYES_SILK  [PAD-JUMPER-2-NO_YES_SILK]  50.55,82.3 90 top
SJ93  JUMPER-PAD-2-NOYES_SILK  [PAD-JUMPER-2-NO_YES_SILK]  46.74,82.3 90 top
SJ94  JUMPER-PAD-2-NOYES_SILK  [PAD-JUMPER-2-NO_YES_SILK]  42.93,82.3 90 top
SJ95  JUMPER-PAD-3-2OF3_NC_BY_TRACE_SMALL  [PAD-JUMPER-3-2OF3_NC_BY_TRACE_YES_SILK_FULL_BOX]  40.39,72.14 90 top
SJ96  JUMPER-PAD-3-2OF3_NC_BY_TRACE_SMALL  [PAD-JUMPER-3-2OF3_NC_BY_TRACE_YES_SILK_FULL_BOX]  40.39,77.22 90 top
SJ97  [PAD-JUMPER-3-3OF3_NC_BY_TRACE_YES_SILK_FULL_BOX]  47.37,54.36 90 top
SJ98  JUMPER-PAD-3-NOYES_SILK  [PAD-JUMPER-3-NO_YES_SILK]  43.56,54.36 90 top
SJ99  JUMPER-PAD-2-NC_BY_PASTE  [PAD-JUMPER-2-NC_BY_PASTE_YES_SILK]  54.99,54.36 270 top
SJ100  JUMPER-PAD-2-NC_BY_PASTE  [PAD-JUMPER-2-NC_BY_PASTE_YES_SILK]  51.18,54.36 270 top
SJ101  JUMPER-PAD-2-NOYES_SILK  [PAD-JUMPER-2-NO_YES_SILK]  62.61,54.36 90 top
SJ102  JUMPER-PAD-2-NOYES_SILK  [PAD-JUMPER-2-NO_YES_SILK]  58.8,54.36 90 top
SJ103  JUMPER-PAD-2-NOYES_SILK  [PAD-JUMPER-2-NO_YES_SILK]  73.91,60.71 270 top
SJ104  JUMPER-PAD-2-NOYES_SILK  [PAD-JUMPER-2-NO_YES_SILK]  77.72,60.71 270 top
SJ105  JUMPER-PAD-2-NOYES_SILK  [PAD-JUMPER-2-NO_YES_SILK]  81.53,60.71 270 top
SJ106  JUMPER-PAD-2-NOYES_SILK  [PAD-JUMPER-2-NO_YES_SILK]  85.34,60.71 270 top
SJ107  JUMPER-PAD-2-NOYES_SILK  [PAD-JUMPER-2-NO_YES_SILK]  89.15,82.3 90 top
SJ108  JUMPER-PAD-2-NOYES_SILK  [PAD-JUMPER-2-NO_YES_SILK]  85.34,82.3 90 top
SJ109  JUMPER-PAD-2-NOYES_SILK  [PAD-JUMPER-2-NO_YES_SILK]  81.53,82.3 90 top
SJ110  JUMPER-PAD-2-NOYES_SILK  [PAD-JUMPER-2-NO_YES_SILK]  77.72,82.3 90 top
SJ111  JUMPER-PAD-2-NOYES_SILK  [PAD-JUMPER-2-NO_YES_SILK]  73.91,82.3 90 top
SJ112  JUMPER-PAD-3-2OF3_NC_BY_TRACE_SMALL  [PAD-JUMPER-3-2OF3_NC_BY_TRACE_YES_SILK_FULL_BOX]  71.37,72.14 90 top
SJ113  JUMPER-PAD-3-2OF3_NC_BY_TRACE_SMALL  [PAD-JUMPER-3-2OF3_NC_BY_TRACE_YES_SILK_FULL_BOX]  71.37,77.22 90 top
SJ114  [PAD-JUMPER-3-3OF3_NC_BY_TRACE_YES_SILK_FULL_BOX]  78.36,54.36 90 top
SJ115  JUMPER-PAD-3-NOYES_SILK  [PAD-JUMPER-3-NO_YES_SILK]  74.55,54.36 90 top
SJ116  JUMPER-PAD-2-NC_BY_PASTE  [PAD-JUMPER-2-NC_BY_PASTE_YES_SILK]  85.98,54.36 270 top
SJ117  JUMPER-PAD-2-NC_BY_PASTE  [PAD-JUMPER-2-NC_BY_PASTE_YES_SILK]  82.17,54.36 270 top
SJ118  JUMPER-PAD-2-NOYES_SILK  [PAD-JUMPER-2-NO_YES_SILK]  93.6,54.36 90 top
SJ119  JUMPER-PAD-2-NOYES_SILK  [PAD-JUMPER-2-NO_YES_SILK]  89.79,54.36 90 top
SJ120  JUMPER-PAD-2-NOYES_SILK  [PAD-JUMPER-2-NO_YES_SILK]  104.9,60.71 270 top
SJ121  JUMPER-PAD-2-NOYES_SILK  [PAD-JUMPER-2-NO_YES_SILK]  108.71,60.71 270 top
SJ122  JUMPER-PAD-2-NOYES_SILK  [PAD-JUMPER-2-NO_YES_SILK]  112.52,60.71 270 top
SJ123  JUMPER-PAD-2-NOYES_SILK  [PAD-JUMPER-2-NO_YES_SILK]  116.33,60.71 270 top
SJ124  JUMPER-PAD-2-NOYES_SILK  [PAD-JUMPER-2-NO_YES_SILK]  120.14,82.3 90 top
SJ125  JUMPER-PAD-2-NOYES_SILK  [PAD-JUMPER-2-NO_YES_SILK]  116.33,82.3 90 top
SJ126  JUMPER-PAD-2-NOYES_SILK  [PAD-JUMPER-2-NO_YES_SILK]  112.52,82.3 90 top
SJ127  JUMPER-PAD-2-NOYES_SILK  [PAD-JUMPER-2-NO_YES_SILK]  108.71,82.3 90 top
SJ128  JUMPER-PAD-2-NOYES_SILK  [PAD-JUMPER-2-NO_YES_SILK]  104.9,82.3 90 top
SJ129  JUMPER-PAD-3-2OF3_NC_BY_TRACE_SMALL  [PAD-JUMPER-3-2OF3_NC_BY_TRACE_YES_SILK_FULL_BOX]  102.36,72.14 90 top
SJ130  JUMPER-PAD-3-2OF3_NC_BY_TRACE_SMALL  [PAD-JUMPER-3-2OF3_NC_BY_TRACE_YES_SILK_FULL_BOX]  102.36,77.22 90 top
SJ131  [PAD-JUMPER-3-3OF3_NC_BY_TRACE_YES_SILK_FULL_BOX]  109.35,54.36 90 top
SJ132  JUMPER-PAD-3-NOYES_SILK  [PAD-JUMPER-3-NO_YES_SILK]  105.54,54.36 90 top
SJ133  JUMPER-PAD-2-NC_BY_PASTE  [PAD-JUMPER-2-NC_BY_PASTE_YES_SILK]  116.97,54.36 270 top
SJ134  JUMPER-PAD-2-NC_BY_PASTE  [PAD-JUMPER-2-NC_BY_PASTE_YES_SILK]  113.16,54.36 270 top
SJ135  JUMPER-PAD-2-NOYES_SILK  [PAD-JUMPER-2-NO_YES_SILK]  124.59,54.36 90 top
SJ136  JUMPER-PAD-2-NOYES_SILK  [PAD-JUMPER-2-NO_YES_SILK]  120.78,54.36 90 top
U1  LSM9DS0  [LGA-24]  23.37,29.72 180 top
U2  EDISON_CONNECTOR_FULLMOUNTING_HOLES  [EDISON_DAUGHTER]  34.8,10.67 0 bottom
U3  EDISON_CONNECTOR_FULLHEADER  [DF40C-70DP-0.4(51)]  31.5,23.04 90 bottom
U4  MIC52053.3V  [SOT23-5]  16.38,28.45 0 top
U5  EDISON_CONNECTOR_FULLMOUNTING_HOLES  [EDISON_DAUGHTER]  65.79,10.67 0 bottom
U6  EDISON_CONNECTOR_FULLHEADER  [DF40C-70DP-0.4(51)]  62.49,23.04 90 bottom
U7  LSM9DS0  [LGA-24]  54.36,29.72 180 top
U8  MIC52053.3V  [SOT23-5]  47.37,28.45 0 top
U9  EDISON_CONNECTOR_FULLMOUNTING_HOLES  [EDISON_DAUGHTER]  96.77,10.67 0 bottom
U10  EDISON_CONNECTOR_FULLHEADER  [DF40C-70DP-0.4(51)]  93.47,23.04 90 bottom
U11  LSM9DS0  [LGA-24]  85.34,29.72 180 top
U12  MIC52053.3V  [SOT23-5]  78.36,28.45 0 top
U13  EDISON_CONNECTOR_FULLMOUNTING_HOLES  [EDISON_DAUGHTER]  127.76,10.67 0 bottom
U14  EDISON_CONNECTOR_FULLHEADER  [DF40C-70DP-0.4(51)]  124.46,23.04 90 bottom
U15  LSM9DS0  [LGA-24]  116.33,29.72 180 top
U16  MIC52053.3V  [SOT23-5]  109.35,28.45 0 top
U17  EDISON_CONNECTOR_FULLMOUNTING_HOLES  [EDISON_DAUGHTER]  34.8,55.63 0 bottom
U18  EDISON_CONNECTOR_FULLHEADER  [DF40C-70DP-0.4(51)]  31.5,68 90 bottom
U19  LSM9DS0  [LGA-24]  23.37,74.68 180 top
U20  MIC52053.3V  [SOT23-5]  16.38,73.41 0 top
U21  EDISON_CONNECTOR_FULLMOUNTING_HOLES  [EDISON_DAUGHTER]  65.79,55.63 0 bottom
U22  EDISON_CONNECTOR_FULLHEADER  [DF40C-70DP-0.4(51)]  62.49,68 90 bottom
U23  LSM9DS0  [LGA-24]  54.36,74.68 180 top
U24  MIC52053.3V  [SOT23-5]  47.37,73.41 0 top
U25  EDISON_CONNECTOR_FULLMOUNTING_HOLES  [EDISON_DAUGHTER]  96.77,55.63 0 bottom
U26  EDISON_CONNECTOR_FULLHEADER  [DF40C-70DP-0.4(51)]  93.47,68 90 bottom
U27  LSM9DS0  [LGA-24]  85.34,74.68 180 top
U28  MIC52053.3V  [SOT23-5]  78.36,73.41 0 top
U29  EDISON_CONNECTOR_FULLMOUNTING_HOLES  [EDISON_DAUGHTER]  127.76,55.63 0 bottom
U30  EDISON_CONNECTOR_FULLHEADER  [DF40C-70DP-0.4(51)]  124.46,68 90 bottom
U31  LSM9DS0  [LGA-24]  116.33,74.68 180 top
U32  MIC52053.3V  [SOT23-5]  109.35,73.41 0 top

## Library data of the parts
C1 C3 C9 C11 C15 C17 C21 C23 C27 C29 C33 C35 C39 C41 C45 C47 = SparkFun-Capacitors; PROD_ID: CAP-00868
C2 C10 C16 C22 C28 C34 C40 C46 = SparkFun-Capacitors; PROD_ID: CAP-11330
C4 C12 C18 C24 C30 C36 C42 C48 = SparkFun-Capacitors; PROD_ID: CAP-00810
C5 C7 C13 C19 C25 C31 C37 C43 = SparkFun-Capacitors; PROD_ID: CAP-07822
C6 C8 C14 C20 C26 C32 C38 C44 = SparkFun-Capacitors; PROD_ID: CAP-08280
E$1 E$2 = SparkFun-Retired
E$3-E$6 FID1-FID32 LOGO1-LOGO24 = SparkFun-Aesthetics
R1-R48 = SparkFun-Resistors; PROD_ID: RES-00824
SJ1-SJ136 = SparkFun-Passives
U1 U7 U11 U15 U19 U23 U27 U31 = SparkFun-DigitalIC
U2 U3 U5 U6 U9 U10 U13 U14 U17 U18 U21 U22 U25 U26 U29 U30 = Edison
U4 U8 U12 U16 U20 U24 U28 U32 = SparkFun-PowerIC; PROD_ID: VREG-00822

## Nets
1.8V: SJ1.2 SJ2.2 SJ3.2 SJ15.2 U1.18 U2.12 U3.12
1.8V1: SJ29.2 SJ30.2 SJ31.2 SJ32.2 U5.12 U6.12 U7.18
1.8V2: SJ46.2 SJ47.2 SJ48.2 SJ49.2 U9.12 U10.12 U11.18
1.8V3: SJ63.2 SJ64.2 SJ65.2 SJ66.2 U13.12 U14.12 U15.18
1.8V4: SJ80.2 SJ81.2 SJ82.2 SJ83.2 U17.12 U18.12 U19.18
1.8V5: SJ97.2 SJ98.2 SJ99.2 SJ100.2 U21.12 U22.12 U23.18
1.8V6: SJ114.2 SJ115.2 SJ116.2 SJ117.2 U25.12 U26.12 U27.18
1.8V7: SJ131.2 SJ132.2 SJ133.2 SJ134.2 U29.12 U30.12 U31.18
3.3V: U2.8 U2.10 U3.8 U3.10
3.3V1: U5.8 U5.10 U6.8 U6.10
3.3V2: U9.8 U9.10 U10.8 U10.10
3.3V3: U13.8 U13.10 U14.8 U14.10
3.3V4: U17.8 U17.10 U18.8 U18.10
3.3V5: U21.8 U21.10 U22.8 U22.10
3.3V6: U25.8 U25.10 U26.8 U26.10
3.3V7: U29.8 U29.10 U30.8 U30.10
3.3V_LOCAL: C2.1 C3.1 C4.1 U1.15 U1.16 U1.17 U4.5
3.3V_LOCAL1: C9.1 C10.1 C12.1 U7.15 U7.16 U7.17 U8.5
3.3V_LOCAL2: C15.1 C16.1 C18.1 U11.15 U11.16 U11.17 U12.5
3.3V_LOCAL3: C21.1 C22.1 C24.1 U15.15 U15.16 U15.17 U16.5
3.3V_LOCAL4: C27.1 C28.1 C30.1 U19.15 U19.16 U19.17 U20.5
3.3V_LOCAL5: C33.1 C34.1 C36.1 U23.15 U23.16 U23.17 U24.5
3.3V_LOCAL6: C39.1 C40.1 C42.1 U27.15 U27.16 U27.17 U28.5
3.3V_LOCAL7: C45.1 C46.1 C48.1 U31.15 U31.16 U31.17 U32.5
CS_G: R3.1 SJ4.1 U1.19
CS_G1: R9.1 SJ18.1 U7.19
CS_G2: R15.1 SJ35.1 U11.19
CS_G3: R21.1 SJ52.1 U15.19
CS_G4: R27.1 SJ69.1 U19.19
CS_G5: R33.1 SJ86.1 U23.19
CS_G6: R39.1 SJ103.1 U27.19
CS_G7: R45.1 SJ120.1 U31.19
CS_XM: R4.1 SJ5.1 U1.20
CS_XM1: R10.1 SJ19.1 U7.20
CS_XM2: R16.1 SJ36.1 U11.20
CS_XM3: R22.1 SJ53.1 U15.20
CS_XM4: R28.1 SJ70.1 U19.20
CS_XM5: R34.1 SJ87.1 U23.20
CS_XM6: R40.1 SJ104.1 U27.20
CS_XM7: R46.1 SJ121.1 U31.20
DCIN: U2.14 U3.14
DCIN1: U5.14 U6.14
DCIN2: U9.14 U10.14
DCIN3: U13.14 U14.14
DCIN4: U17.14 U18.14
DCIN5: U21.14 U22.14
DCIN6: U25.14 U26.14
DCIN7: U29.14 U30.14
DEN_G: SJ10.1 U1.10
DEN_G1: SJ22.1 U7.10
DEN_G2: SJ39.1 U11.10
DEN_G3: SJ56.1 U15.10
DEN_G4: SJ73.1 U19.10
DEN_G5: SJ90.1 U23.10
DEN_G6: SJ107.1 U27.10
DEN_G7: SJ124.1 U31.10
DRDY_G: SJ12.1 U1.12
DRDY_G1: SJ24.1 U7.12
DRDY_G2: SJ41.1 U11.12
DRDY_G3: SJ58.1 U15.12
DRDY_G4: SJ75.1 U19.12
DRDY_G5: SJ92.1 U23.12
DRDY_G6: SJ109.1 U27.12
DRDY_G7: SJ126.1 U31.12
FAULT: U2.19 U3.19
FAULT1: U5.19 U6.19
FAULT2: U9.19 U10.19
FAULT3: U13.19 U14.19
FAULT4: U17.19 U18.19
FAULT5: U21.19 U22.19
FAULT6: U25.19 U26.19
FAULT7: U29.19 U30.19
FW_RCVR: U2.69 U3.69
FW_RCVR1: U5.69 U6.69
FW_RCVR2: U9.69 U10.69
FW_RCVR3: U13.69 U14.69
FW_RCVR4: U17.69 U18.69
FW_RCVR5: U21.69 U22.69
FW_RCVR6: U25.69 U26.69
FW_RCVR7: U29.69 U30.69
GND: C1.2 C2.2 C3.2 C4.2 C6.2 SJ16.1 SJ17.1 U1.2 U1.3 U1.4 U1.5 U1.6 U2.1 U2.5 U2.9 U2.11 U2.13 U2.15 U3.1 U3.5 U3.9 U3.11 U3.13 U3.15 U4.2
GND1: C8.2 C9.2 C10.2 C11.2 C12.2 SJ33.1 SJ34.1 U5.1 U5.5 U5.9 U5.11 U5.13 U5.15 U6.1 U6.5 U6.9 U6.11 U6.13 U6.15 U7.2 U7.3 U7.4 U7.5 U7.6 U8.2
GND2: C14.2 C15.2 C16.2 C17.2 C18.2 SJ50.1 SJ51.1 U9.1 U9.5 U9.9 U9.11 U9.13 U9.15 U10.1 U10.5 U10.9 U10.11 U10.13 U10.15 U11.2 U11.3 U11.4 U11.5 U11.6 U12.2
GND3: C20.2 C21.2 C22.2 C23.2 C24.2 SJ67.1 SJ68.1 U13.1 U13.5 U13.9 U13.11 U13.13 U13.15 U14.1 U14.5 U14.9 U14.11 U14.13 U14.15 U15.2 U15.3 U15.4 U15.5 U15.6 U16.2
GND4: C26.2 C27.2 C28.2 C29.2 C30.2 SJ84.1 SJ85.1 U17.1 U17.5 U17.9 U17.11 U17.13 U17.15 U18.1 U18.5 U18.9 U18.11 U18.13 U18.15 U19.2 U19.3 U19.4 U19.5 U19.6 U20.2
GND5: C32.2 C33.2 C34.2 C35.2 C36.2 SJ101.1 SJ102.1 U21.1 U21.5 U21.9 U21.11 U21.13 U21.15 U22.1 U22.5 U22.9 U22.11 U22.13 U22.15 U23.2 U23.3 U23.4 U23.5 U23.6 U24.2
GND6: C38.2 C39.2 C40.2 C41.2 C42.2 SJ118.1 SJ119.1 U25.1 U25.5 U25.9 U25.11 U25.13 U25.15 U26.1 U26.5 U26.9 U26.11 U26.13 U26.15 U27.2 U27.3 U27.4 U27.5 U27.6 U28.2
GND7: C44.2 C45.2 C46.2 C47.2 C48.2 SJ135.1 SJ136.1 U29.1 U29.5 U29.9 U29.11 U29.13 U29.15 U30.1 U30.5 U30.9 U30.11 U30.13 U30.15 U31.2 U31.3 U31.4 U31.5 U31.6 U32.2
GP1: U5.48 U6.48
GP2: U5.42 U6.42
GP3: SJ26.2 U5.34 U6.34
GP4: SJ25.2 U5.32 U6.32
GP5: SJ24.2 U5.30 U6.30
GP6: SJ23.2 U5.28 U6.28
GP7: U5.26 U6.26
GP8: SJ22.2 U5.25 U6.25
GP9: U5.24 U6.24
GP10: U9.48 U10.48
GP11: U9.42 U10.42
GP12: SJ43.2 U9.34 U10.34
GP12_PWM0: U2.35 U3.35
GP12_PWM1: U5.35 U6.35
GP12_PWM2: U9.35 U10.35
GP12_PWM3: U13.35 U14.35
GP12_PWM4: U17.35 U18.35
GP12_PWM5: U21.35 U22.35
GP12_PWM6: U25.35 U26.35
GP12_PWM7: U29.35 U30.35
GP13: SJ42.2 U9.32 U10.32
GP13_PWM1: U2.33 U3.33
GP13_PWM2: U5.33 U6.33
GP13_PWM3: U9.33 U10.33
GP13_PWM4: U13.33 U14.33
GP13_PWM5: U17.33 U18.33
GP13_PWM6: U21.33 U22.33
GP13_PWM7: U25.33 U26.33
GP13_PWM8: U29.33 U30.33
GP14: U2.48 U3.48
GP15: U2.42 U3.42
GP16: SJ41.2 U9.30 U10.30
GP17: SJ40.2 U9.28 U10.28
GP18: U9.26 U10.26
GP19: SJ39.2 U9.25 U10.25
GP19_I2C_1_SCL: SJ9.3 U2.41 U3.41
GP19_I2C_1_SCL1: SJ28.3 U5.41 U6.41
GP19_I2C_1_SCL2: SJ45.3 U9.41 U10.41
GP19_I2C_1_SCL3: SJ62.3 U13.41 U14.41
GP19_I2C_1_SCL4: SJ79.3 U17.41 U18.41
GP19_I2C_1_SCL5: SJ96.3 U21.41 U22.41
GP19_I2C_1_SCL6: SJ113.3 U25.41 U26.41
GP19_I2C_1_SCL7: SJ130.3 U29.41 U30.41
GP20: U9.24 U10.24
GP20_I2C_1_SDA: SJ8.3 U2.43 U3.43
GP20_I2C_1_SDA1: SJ27.3 U5.43 U6.43
GP20_I2C_1_SDA2: SJ44.3 U9.43 U10.43
GP20_I2C_1_SDA3: SJ61.3 U13.43 U14.43
GP20_I2C_1_SDA4: SJ78.3 U17.43 U18.43
GP20_I2C_1_SDA5: SJ95.3 U21.43 U22.43
GP20_I2C_1_SDA6: SJ112.3 U25.43 U26.43
GP20_I2C_1_SDA7: SJ129.3 U29.43 U30.43
GP21: U13.48 U14.48
GP22: U13.42 U14.42
GP23: SJ60.2 U13.34 U14.34
GP24: SJ59.2 U13.32 U14.32
GP25: SJ58.2 U13.30 U14.30
GP26: SJ57.2 U13.28 U14.28
GP27: U13.26 U14.26
GP27_I2C_6_SCL: U2.45 U3.45
GP27_I2C_6_SCL1: U5.45 U6.45
GP27_I2C_6_SCL2: U9.45 U10.45
GP27_I2C_6_SCL3: U13.45 U14.45
GP27_I2C_6_SCL4: U17.45 U18.45
GP27_I2C_6_SCL5: U21.45 U22.45
GP27_I2C_6_SCL6: U25.45 U26.45
GP27_I2C_6_SCL7: U29.45 U30.45
GP28: SJ56.2 U13.25 U14.25
GP28_I2C_6_SDA: U2.47 U3.47
GP28_I2C_6_SDA1: U5.47 U6.47
GP28_I2C_6_SDA2: U9.47 U10.47
GP28_I2C_6_SDA3: U13.47 U14.47
GP28_I2C_6_SDA4: U17.47 U18.47
GP28_I2C_6_SDA5: U21.47 U22.47
GP28_I2C_6_SDA6: U25.47 U26.47
GP28_I2C_6_SDA7: U29.47 U30.47
GP29: U13.24 U14.24
GP30: U17.48 U18.48
GP31: U17.42 U18.42
GP32: SJ77.2 U17.34 U18.34
GP33: SJ76.2 U17.32 U18.32
GP34: SJ75.2 U17.30 U18.30
GP35: SJ74.2 U17.28 U18.28
GP36: U17.26 U18.26
GP37: SJ73.2 U17.25 U18.25
GP38: U17.24 U18.24
GP39: U21.48 U22.48
GP40: U21.42 U22.42
GP40_I2S_2_CLK: U2.52 U3.52
GP40_I2S_2_CLK1: U5.52 U6.52
GP40_I2S_2_CLK2: U9.52 U10.52
GP40_I2S_2_CLK3: U13.52 U14.52
GP40_I2S_2_CLK4: U17.52 U18.52
GP40_I2S_2_CLK5: U21.52 U22.52
GP40_I2S_2_CLK6: U25.52 U26.52
GP40_I2S_2_CLK7: U29.52 U30.52
GP41: SJ94.2 U21.34 U22.34
GP41_I2S_2_FS: U2.54 U3.54
GP41_I2S_2_FS1: U5.54 U6.54
GP41_I2S_2_FS2: U9.54 U10.54
GP41_I2S_2_FS3: U13.54 U14.54
GP41_I2S_2_FS4: U17.54 U18.54
GP41_I2S_2_FS5: U21.54 U22.54
GP41_I2S_2_FS6: U25.54 U26.54
GP41_I2S_2_FS7: U29.54 U30.54
GP42: SJ93.2 U21.32 U22.32
GP42_I2S_2_RXD: U2.50 U3.50
GP42_I2S_2_RXD1: U5.50 U6.50
GP42_I2S_2_RXD2: U9.50 U10.50
GP42_I2S_2_RXD3: U13.50 U14.50
GP42_I2S_2_RXD4: U17.50 U18.50
GP42_I2S_2_RXD5: U21.50 U22.50
GP42_I2S_2_RXD6: U25.50 U26.50
GP42_I2S_2_RXD7: U29.50 U30.50
GP43: SJ92.2 U21.30 U22.30
GP43_I2S_2_TXD: U2.56 U3.56
GP43_I2S_2_TXD1: U5.56 U6.56
GP43_I2S_2_TXD2: U9.56 U10.56
GP43_I2S_2_TXD3: U13.56 U14.56
GP43_I2S_2_TXD4: U17.56 U18.56
GP43_I2S_2_TXD5: U21.56 U22.56
GP43_I2S_2_TXD6: U25.56 U26.56
GP43_I2S_2_TXD7: U29.56 U30.56
GP44: U2.24 U3.24
GP45: U2.26 U3.26
GP46: SJ11.2 U2.28 U3.28
GP47: SJ12.2 U2.30 U3.30
GP48: SJ13.2 U2.32 U3.32
GP49: SJ14.2 U2.34 U3.34
GP50: SJ91.2 U21.28 U22.28
GP51: U21.26 U22.26
GP52: SJ90.2 U21.25 U22.25
GP53: U21.24 U22.24
GP54: U25.48 U26.48
GP55: U25.42 U26.42
GP56: SJ111.2 U25.34 U26.34
GP57: SJ110.2 U25.32 U26.32
GP58: SJ109.2 U25.30 U26.30
GP59: SJ108.2 U25.28 U26.28
GP60: U25.26 U26.26
GP61: SJ107.2 U25.25 U26.25
GP62: U25.24 U26.24
GP63: U29.48 U30.48
GP64: U29.42 U30.42
GP65: SJ128.2 U29.34 U30.34
GP66: SJ127.2 U29.32 U30.32
GP67: SJ126.2 U29.30 U30.30
GP68: SJ125.2 U29.28 U30.28
GP69: U29.26 U30.26
GP70: SJ124.2 U29.25 U30.25
GP71: U29.24 U30.24
GP77_SD_0_CD#: U2.60 U3.60
GP77_SD_0_CD#1: U5.60 U6.60
GP77_SD_0_CD#2: U9.60 U10.60
GP77_SD_0_CD#3: U13.60 U14.60
GP77_SD_0_CD#4: U17.60 U18.60
GP77_SD_0_CD#5: U21.60 U22.60
GP77_SD_0_CD#6: U25.60 U26.60
GP77_SD_0_CD#7: U29.60 U30.60
GP78_SD_0_CLK: U2.58 U3.58
GP78_SD_0_CLK1: U5.58 U6.58
GP78_SD_0_CLK2: U9.58 U10.58
GP78_SD_0_CLK3: U13.58 U14.58
GP78_SD_0_CLK4: U17.58 U18.58
GP78_SD_0_CLK5: U21.58 U22.58
GP78_SD_0_CLK6: U25.58 U26.58
GP78_SD_0_CLK7: U29.58 U30.58
GP79_SD_0_CMD: U2.62 U3.62
GP79_SD_0_CMD1: U5.62 U6.62
GP79_SD_0_CMD2: U9.62 U10.62
GP79_SD_0_CMD3: U13.62 U14.62
GP79_SD_0_CMD4: U17.62 U18.62
GP79_SD_0_CMD5: U21.62 U22.62
GP79_SD_0_CMD6: U25.62 U26.62
GP79_SD_0_CMD7: U29.62 U30.62
GP80_SD_0_DAT0: U2.66 U3.66
GP80_SD_0_DAT1: U5.66 U6.66
GP80_SD_0_DAT2: U9.66 U10.66
GP80_SD_0_DAT3: U13.66 U14.66
GP80_SD_0_DAT4: U17.66 U18.66
GP80_SD_0_DAT5: U21.66 U22.66
GP80_SD_0_DAT6: U25.66 U26.66
GP80_SD_0_DAT7: U29.66 U30.66
GP81_SD_0_DAT1: U2.70 U3.70
GP81_SD_0_DAT2: U5.70 U6.70
GP81_SD_0_DAT3: U9.70 U10.70
GP81_SD_0_DAT4: U13.70 U14.70
GP81_SD_0_DAT5: U17.70 U18.70
GP81_SD_0_DAT6: U21.70 U22.70
GP81_SD_0_DAT7: U25.70 U26.70
GP81_SD_0_DAT8: U29.70 U30.70
GP82_SD_0_DAT1: U5.64 U6.64
GP82_SD_0_DAT2: U2.64 U3.64
GP82_SD_0_DAT3: U9.64 U10.64
GP82_SD_0_DAT4: U13.64 U14.64
GP82_SD_0_DAT5: U17.64 U18.64
GP82_SD_0_DAT6: U21.64 U22.64
GP82_SD_0_DAT7: U25.64 U26.64
GP82_SD_0_DAT8: U29.64 U30.64
GP83_SD_0_DAT1: U5.68 U6.68
GP83_SD_0_DAT2: U9.68 U10.68
GP83_SD_0_DAT3: U2.68 U3.68
GP83_SD_0_DAT4: U13.68 U14.68
GP83_SD_0_DAT5: U17.68 U18.68
GP83_SD_0_DAT6: U21.68 U22.68
GP83_SD_0_DAT7: U25.68 U26.68
GP83_SD_0_DAT8: U29.68 U30.68
GP84_SD_CLK_FB: U2.44 U3.44
GP84_SD_CLK_FB1: U5.44 U6.44
GP84_SD_CLK_FB2: U9.44 U10.44
GP84_SD_CLK_FB3: U13.44 U14.44
GP84_SD_CLK_FB4: U17.44 U18.44
GP84_SD_CLK_FB5: U21.44 U22.44
GP84_SD_CLK_FB6: U25.44 U26.44
GP84_SD_CLK_FB7: U29.44 U30.44
GP109_SPI_2_CLK: SJ9.1 U2.55 U3.55
GP109_SPI_2_CLK1: SJ28.1 U5.55 U6.55
GP109_SPI_2_CLK2: SJ45.1 U9.55 U10.55
GP109_SPI_2_CLK3: SJ62.1 U13.55 U14.55
GP109_SPI_2_CLK4: SJ79.1 U17.55 U18.55
GP109_SPI_2_CLK5: SJ96.1 U21.55 U22.55
GP109_SPI_2_CLK6: SJ113.1 U25.55 U26.55
GP109_SPI_2_CLK7: SJ130.1 U29.55 U30.55
GP110_SPI_2_FS0: SJ4.2 U2.53 U3.53
GP110_SPI_2_FS1: SJ18.2 U5.53 U6.53
GP110_SPI_2_FS2: SJ35.2 U9.53 U10.53
GP110_SPI_2_FS3: SJ52.2 U13.53 U14.53
GP110_SPI_2_FS4: SJ69.2 U17.53 U18.53
GP110_SPI_2_FS5: SJ86.2 U21.53 U22.53
GP110_SPI_2_FS6: SJ103.2 U25.53 U26.53
GP110_SPI_2_FS7: SJ120.2 U29.53 U30.53
GP111_SPI_2_FS1: SJ5.2 U2.51 U3.51
GP111_SPI_2_FS2: SJ19.2 U5.51 U6.51
GP111_SPI_2_FS3: SJ36.2 U9.51 U10.51
GP111_SPI_2_FS4: SJ53.2 U13.51 U14.51
GP111_SPI_2_FS5: SJ70.2 U17.51 U18.51
GP111_SPI_2_FS6: SJ87.2 U21.51 U22.51
GP111_SPI_2_FS7: SJ104.2 U25.51 U26.51
GP111_SPI_2_FS8: SJ121.2 U29.51 U30.51
GP114_SPI_2_RXD: SJ6.2 SJ7.2 U2.59 U3.59
GP114_SPI_2_RXD1: SJ20.2 SJ21.2 U5.59 U6.59
GP114_SPI_2_RXD2: SJ37.2 SJ38.2 U9.59 U10.59
GP114_SPI_2_RXD3: SJ54.2 SJ55.2 U13.59 U14.59
GP114_SPI_2_RXD4: SJ71.2 SJ72.2 U17.59 U18.59
GP114_SPI_2_RXD5: SJ88.2 SJ89.2 U21.59 U22.59
GP114_SPI_2_RXD6: SJ105.2 SJ106.2 U25.59 U26.59
GP114_SPI_2_RXD7: SJ122.2 SJ123.2 U29.59 U30.59
GP115_SPI_2_TXD: SJ8.1 U2.57 U3.57
GP115_SPI_2_TXD1: SJ27.1 U5.57 U6.57
GP115_SPI_2_TXD2: SJ44.1 U9.57 U10.57
GP115_SPI_2_TXD3: SJ61.1 U13.57 U14.57
GP115_SPI_2_TXD4: SJ78.1 U17.57 U18.57
GP115_SPI_2_TXD5: SJ95.1 U21.57 U22.57
GP115_SPI_2_TXD6: SJ112.1 U25.57 U26.57
GP115_SPI_2_TXD7: SJ129.1 U29.57 U30.57
GP128_UART_1_CTS: U2.65 U3.65
GP128_UART_1_CTS1: U5.65 U6.65
GP128_UART_1_CTS2: U9.65 U10.65
GP128_UART_1_CTS3: U13.65 U14.65
GP128_UART_1_CTS4: U17.65 U18.65
GP128_UART_1_CTS5: U21.65 U22.65
GP128_UART_1_CTS6: U25.65 U26.65
GP128_UART_1_CTS7: U29.65 U30.65
GP129_UART_1_RTS: U2.63 U3.63
GP129_UART_1_RTS1: U5.63 U6.63
GP129_UART_1_RTS2: U9.63 U10.63
GP129_UART_1_RTS3: U13.63 U14.63
GP129_UART_1_RTS4: U17.63 U18.63
GP129_UART_1_RTS5: U21.63 U22.63
GP129_UART_1_RTS6: U25.63 U26.63
GP129_UART_1_RTS7: U29.63 U30.63
GP130_UART_1_RX: U2.61 U3.61
GP130_UART_1_RX1: U5.61 U6.61
GP130_UART_1_RX2: U9.61 U10.61
GP130_UART_1_RX3: U13.61 U14.61
GP130_UART_1_RX4: U17.61 U18.61
GP130_UART_1_RX5: U21.61 U22.61
GP130_UART_1_RX6: U25.61 U26.61
GP130_UART_1_RX7: U29.61 U30.61
GP131_UART_1_TX: U2.46 U3.46
GP131_UART_1_TX1: U5.46 U6.46
GP131_UART_1_TX2: U9.46 U10.46
GP131_UART_1_TX3: U13.46 U14.46
GP131_UART_1_TX4: U17.46 U18.46
GP131_UART_1_TX5: U21.46 U22.46
GP131_UART_1_TX6: U25.46 U26.46
GP131_UART_1_TX7: U29.46 U30.46
GP134_UART_2_RX: U2.22 U3.22
GP134_UART_2_RX1: U5.22 U6.22
GP134_UART_2_RX2: U9.22 U10.22
GP134_UART_2_RX3: U13.22 U14.22
GP134_UART_2_RX4: U17.22 U18.22
GP134_UART_2_RX5: U21.22 U22.22
GP134_UART_2_RX6: U25.22 U26.22
GP134_UART_2_RX7: U29.22 U30.22
GP135_UART_2_TX: U2.27 U3.27
GP135_UART_2_TX1: U5.27 U6.27
GP135_UART_2_TX2: U9.27 U10.27
GP135_UART_2_TX3: U13.27 U14.27
GP135_UART_2_TX4: U17.27 U18.27
GP135_UART_2_TX5: U21.27 U22.27
GP135_UART_2_TX6: U25.27 U26.27
GP135_UART_2_TX7: U29.27 U30.27
GP165: SJ10.2 U2.25 U3.25
GP182_PWM1: U5.37 U6.37
GP182_PWM2: U2.37 U3.37
GP182_PWM3: U9.37 U10.37
GP182_PWM4: U13.37 U14.37
GP182_PWM5: U17.37 U18.37
GP182_PWM6: U21.37 U22.37
GP182_PWM7: U25.37 U26.37
GP182_PWM8: U29.37 U30.37
GP183_PWM1: U5.39 U6.39
GP183_PWM2: U9.39 U10.39
GP183_PWM3: U2.39 U3.39
GP183_PWM4: U13.39 U14.39
GP183_PWM5: U17.39 U18.39
GP183_PWM6: U21.39 U22.39
GP183_PWM7: U25.39 U26.39
GP183_PWM8: U29.39 U30.39
INT1_XM: SJ13.1 U1.13
INT1_XM1: SJ25.1 U7.13
INT1_XM2: SJ42.1 U11.13
INT1_XM3: SJ59.1 U15.13
INT1_XM4: SJ76.1 U19.13
INT1_XM5: SJ93.1 U23.13
INT1_XM6: SJ110.1 U27.13
INT1_XM7: SJ127.1 U31.13
INT2_XM: SJ14.1 U1.14
INT2_XM1: SJ26.1 U7.14
INT2_XM2: SJ43.1 U11.14
INT2_XM3: SJ60.1 U15.14
INT2_XM4: SJ77.1 U19.14
INT2_XM5: SJ94.1 U23.14
INT2_XM6: SJ111.1 U27.14
INT2_XM7: SJ128.1 U31.14
INT_G: SJ11.1 U1.11
INT_G1: SJ23.1 U7.11
INT_G2: SJ40.1 U11.11
INT_G3: SJ57.1 U15.11
INT_G4: SJ74.1 U19.11
INT_G5: SJ91.1 U23.11
INT_G6: SJ108.1 U27.11
INT_G7: SJ125.1 U31.11
MSIC_SLP_CLK: U2.7 U3.7
MSIC_SLP_CLK1: U5.7 U6.7
MSIC_SLP_CLK2: U9.7 U10.7
MSIC_SLP_CLK3: U13.7 U14.7
MSIC_SLP_CLK4: U17.7 U18.7
MSIC_SLP_CLK5: U21.7 U22.7
MSIC_SLP_CLK6: U25.7 U26.7
MSIC_SLP_CLK7: U29.7 U30.7
N$1: C5.1 U1.9
N$2: C5.2 U1.8
N$3: C6.1 U1.7
N$4: R3.2 SJ2.1
N$5: R4.2 SJ2.3
N$6: R1.2 SJ1.3
N$7: R2.2 SJ1.1
N$8: C7.1 U7.9
N$9: C7.2 U7.8
N$10: C8.1 U7.7
N$11: R7.2 SJ30.3
N$12: R5.2 SJ3.1
N$13: R6.2 SJ15.1
N$14: R8.2 SJ30.1
N$15: R9.2 SJ29.1
N$16: R10.2 SJ29.3
N$17: R11.2 SJ31.1
N$18: R12.2 SJ32.1
N$19: C13.1 U11.9
N$20: C13.2 U11.8
N$21: C14.1 U11.7
N$22: R13.2 SJ47.3
N$23: R14.2 SJ47.1
N$24: R15.2 SJ46.1
N$25: R16.2 SJ46.3
N$26: R17.2 SJ48.1
N$27: R18.2 SJ49.1
N$28: C19.1 U15.9
N$29: C19.2 U15.8
N$30: C20.1 U15.7
N$31: R19.2 SJ64.3
N$32: R20.2 SJ64.1
N$33: R21.2 SJ63.1
N$34: R22.2 SJ63.3
N$35: R23.2 SJ65.1
N$36: R24.2 SJ66.1
N$37: C25.1 U19.9
N$38: C25.2 U19.8
N$39: C26.1 U19.7
N$40: R25.2 SJ81.3
N$41: R26.2 SJ81.1
N$42: R27.2 SJ80.1
N$43: R28.2 SJ80.3
N$44: R29.2 SJ82.1
N$45: R30.2 SJ83.1
N$46: C31.1 U23.9
N$47: C31.2 U23.8
N$48: C32.1 U23.7
N$49: R31.2 SJ98.3
N$50: R32.2 SJ98.1
N$51: R33.2 SJ97.1
N$52: R34.2 SJ97.3
N$53: R35.2 SJ99.1
N$54: R36.2 SJ100.1
N$55: C37.1 U27.9
N$56: C37.2 U27.8
N$57: C38.1 U27.7
N$58: R37.2 SJ115.3
N$59: R38.2 SJ115.1
N$60: R39.2 SJ114.1
N$61: R40.2 SJ114.3
N$62: R41.2 SJ116.1
N$63: R42.2 SJ117.1
N$64: C43.1 U31.9
N$65: C43.2 U31.8
N$66: C44.1 U31.7
N$67: R43.2 SJ132.3
N$68: R44.2 SJ132.1
N$69: R45.2 SJ131.1
N$70: R46.2 SJ131.3
N$71: R47.2 SJ133.1
N$72: R48.2 SJ134.1
OSC_CLK_OUT: U2.67 U3.67
OSC_CLK_OUT1: U5.67 U6.67
OSC_CLK_OUT2: U9.67 U10.67
OSC_CLK_OUT3: U13.67 U14.67
OSC_CLK_OUT4: U17.67 U18.67
OSC_CLK_OUT5: U21.67 U22.67
OSC_CLK_OUT6: U25.67 U26.67
OSC_CLK_OUT7: U29.67 U30.67
PSW: U2.21 U3.21
PSW1: U5.21 U6.21
PSW2: U9.21 U10.21
PSW3: U13.21 U14.21
PSW4: U17.21 U18.21
PSW5: U21.21 U22.21
PSW6: U25.21 U26.21
PSW7: U29.21 U30.21
PWRBTN#: U2.17 U3.17
PWRBTN#1: U5.17 U6.17
PWRBTN#2: U9.17 U10.17
PWRBTN#3: U13.17 U14.17
PWRBTN#4: U17.17 U18.17
PWRBTN#5: U21.17 U22.17
PWRBTN#6: U25.17 U26.17
PWRBTN#7: U29.17 U30.17
RCVR_MODE: U2.31 U3.31
RCVR_MODE1: U5.31 U6.31
RCVR_MODE2: U9.31 U10.31
RCVR_MODE3: U13.31 U14.31
RCVR_MODE4: U17.31 U18.31
RCVR_MODE5: U21.31 U22.31
RCVR_MODE6: U25.31 U26.31
RCVR_MODE7: U29.31 U30.31
RESET_OUT#: U2.36 U3.36
RESET_OUT#1: U5.36 U6.36
RESET_OUT#2: U9.36 U10.36
RESET_OUT#3: U13.36 U14.36
RESET_OUT#4: U17.36 U18.36
RESET_OUT#5: U21.36 U22.36
RESET_OUT#6: U25.36 U26.36
RESET_OUT#7: U29.36 U30.36
SCL: R2.1 SJ9.2 U1.21
SCL1: R8.1 SJ28.2 U7.21
SCL2: R14.1 SJ45.2 U11.21
SCL3: R20.1 SJ62.2 U15.21
SCL4: R26.1 SJ79.2 U19.21
SCL5: R32.1 SJ96.2 U23.21
SCL6: R38.1 SJ113.2 U27.21
SCL7: R44.1 SJ130.2 U31.21
SDA: R1.1 SJ8.2 U1.24
SDA1: R7.1 SJ27.2 U7.24
SDA2: R13.1 SJ44.2 U11.24
SDA3: R19.1 SJ61.2 U15.24
SDA4: R25.1 SJ78.2 U19.24
SDA5: R31.1 SJ95.2 U23.24
SDA6: R37.1 SJ112.2 U27.24
SDA7: R43.1 SJ129.2 U31.24
SDO_G: R6.1 SJ6.1 SJ17.2 U1.22
SDO_G1: R12.1 SJ20.1 SJ34.2 U7.22
SDO_G2: R18.1 SJ37.1 SJ51.2 U11.22
SDO_G3: R24.1 SJ54.1 SJ68.2 U15.22
SDO_G4: R30.1 SJ71.1 SJ85.2 U19.22
SDO_G5: R36.1 SJ88.1 SJ102.2 U23.22
SDO_G6: R42.1 SJ105.1 SJ119.2 U27.22
SDO_G7: R48.1 SJ122.1 SJ136.2 U31.22
SDO_XM: R5.1 SJ7.1 SJ16.2 U1.23
SDO_XM1: R11.1 SJ21.1 SJ33.2 U7.23
SDO_XM2: R17.1 SJ38.1 SJ50.2 U11.23
SDO_XM3: R23.1 SJ55.1 SJ67.2 U15.23
SDO_XM4: R29.1 SJ72.1 SJ84.2 U19.23
SDO_XM5: R35.1 SJ89.1 SJ101.2 U23.23
SDO_XM6: R41.1 SJ106.1 SJ118.2 U27.23
SDO_XM7: R47.1 SJ123.1 SJ135.2 U31.23
USB_DN: U2.18 U3.18
USB_DN1: U5.18 U6.18
USB_DN2: U9.18 U10.18
USB_DN3: U13.18 U14.18
USB_DN4: U17.18 U18.18
USB_DN5: U21.18 U22.18
USB_DN6: U25.18 U26.18
USB_DN7: U29.18 U30.18
USB_DP: U2.16 U3.16
USB_DP1: U5.16 U6.16
USB_DP2: U9.16 U10.16
USB_DP3: U13.16 U14.16
USB_DP4: U17.16 U18.16
USB_DP5: U21.16 U22.16
USB_DP6: U25.16 U26.16
USB_DP7: U29.16 U30.16
USB_ID: U2.3 U3.3
USB_ID1: U5.3 U6.3
USB_ID2: U9.3 U10.3
USB_ID3: U13.3 U14.3
USB_ID4: U17.3 U18.3
USB_ID5: U21.3 U22.3
USB_ID6: U25.3 U26.3
USB_ID7: U29.3 U30.3
USB_VBUS: U2.20 U3.20
USB_VBUS1: U5.20 U6.20
USB_VBUS2: U9.20 U10.20
USB_VBUS3: U13.20 U14.20
USB_VBUS4: U17.20 U18.20
USB_VBUS5: U21.20 U22.20
USB_VBUS6: U25.20 U26.20
USB_VBUS7: U29.20 U30.20
V_BAT_BKUP: U2.23 U3.23
V_BAT_BKUP1: U5.23 U6.23
V_BAT_BKUP2: U9.23 U10.23
V_BAT_BKUP3: U13.23 U14.23
V_BAT_BKUP4: U17.23 U18.23
V_BAT_BKUP5: U21.23 U22.23
V_BAT_BKUP6: U25.23 U26.23
V_BAT_BKUP7: U29.23 U30.23
VSYS: C1.1 U2.2 U2.4 U2.6 U3.2 U3.4 U3.6 U4.1 U4.3
VSYS1: C11.1 U5.2 U5.4 U5.6 U6.2 U6.4 U6.6 U8.1 U8.3
VSYS2: C17.1 U9.2 U9.4 U9.6 U10.2 U10.4 U10.6 U12.1 U12.3
VSYS3: C23.1 U13.2 U13.4 U13.6 U14.2 U14.4 U14.6 U16.1 U16.3
VSYS4: C29.1 U17.2 U17.4 U17.6 U18.2 U18.4 U18.6 U20.1 U20.3
VSYS5: C35.1 U21.2 U21.4 U21.6 U22.2 U22.4 U22.6 U24.1 U24.3
VSYS6: C41.1 U25.2 U25.4 U25.6 U26.2 U26.4 U26.6 U28.1 U28.3
VSYS7: C47.1 U29.2 U29.4 U29.6 U30.2 U30.4 U30.6 U32.1 U32.3

## Tracks (layer width: path | path; a pad name or v marks a point on that pad's centre or on a via)
1.8V  (via drill 0.33)
  Top 0.152: U3.12 29.16,27.84 28.5,28.5 27.36,28.5 v27.3,28.55
  Top 0.203: U1.18 20.72,28.47 20.57,28.32 20.57,28.07 20.83,27.81 v20.83,27.18
  Top 0.254: v13.46,18.54 14.22,19.3 14.22,23.37 15.49,24.64 16.51,24.64 18.29,26.42 20.07,26.42 v20.83,27.18 | SJ1.2 13.97,9.4 | 13.97,9.4 14.73,10.16 v14.73,11.68 | SJ3.2 SJ15.2 18.19,8.98 | SJ2.2 17.78,9.4 18.19,8.98 | 18.19,8.98 18.19,8.29 17.53,7.62 14.73,7.62 13.97,8.38 13.97,9.4
  Bottom 0.152: v27.3,28.55 27.36,28.5 28.5,28.5 29.16,27.84 U3.12
  Bottom 0.203: v20.83,27.18 24.64,27.18 26.18,28.71 27.14,28.71 v27.3,28.55
  Bottom 0.254: v13.46,18.54 14.73,17.27 v14.73,11.68
1.8V1  (via drill 0.33)
  Top 0.152: U6.12 60.15,27.84 59.49,28.5 58.34,28.5 v58.29,28.55
  Top 0.203: U7.18 51.71,28.47 51.56,28.32 51.56,28.07 51.82,27.81 v51.82,27.18
  Top 0.254: v44.45,18.54 45.21,19.3 45.21,23.37 46.48,24.64 47.5,24.64 49.28,26.42 51.05,26.42 v51.82,27.18 | SJ30.2 44.96,9.4 | 44.96,9.4 45.72,10.16 v45.72,11.68 | SJ31.2 SJ32.2 49.18,8.98 | SJ29.2 48.77,9.4 49.18,8.98 | 49.18,8.98 49.18,8.29 48.51,7.62 45.72,7.62 44.96,8.38 44.96,9.4
  Bottom 0.152: v58.29,28.55 58.34,28.5 59.49,28.5 60.15,27.84 U6.12
  Bottom 0.203: v51.82,27.18 55.63,27.18 57.16,28.71 58.13,28.71 v58.29,28.55
  Bottom 0.254: v44.45,18.54 45.72,17.27 v45.72,11.68
1.8V2  (via drill 0.33)
  Top 0.152: U10.12 91.14,27.84 90.47,28.5 89.33,28.5 v89.28,28.55
  Top 0.203: U11.18 82.7,28.47 82.55,28.32 82.55,28.07 82.8,27.81 v82.8,27.18
  Top 0.254: v75.44,18.54 76.2,19.3 76.2,23.37 77.47,24.64 78.49,24.64 80.26,26.42 82.04,26.42 v82.8,27.18 | SJ47.2 75.95,9.4 | 75.95,9.4 76.71,10.16 v76.71,11.68 | SJ48.2 SJ49.2 80.17,8.98 | SJ46.2 79.76,9.4 80.17,8.98 | 80.17,8.98 80.17,8.29 79.5,7.62 76.71,7.62 75.95,8.38 75.95,9.4
  Bottom 0.152: v89.28,28.55 89.33,28.5 90.47,28.5 91.14,27.84 U10.12
  Bottom 0.203: v82.8,27.18 86.61,27.18 88.15,28.71 89.12,28.71 v89.28,28.55
  Bottom 0.254: v75.44,18.54 76.71,17.27 v76.71,11.68
1.8V3  (via drill 0.33)
  Top 0.152: U14.12 122.12,27.84 121.46,28.5 120.32,28.5 v120.27,28.55
  Top 0.203: U15.18 113.69,28.47 113.54,28.32 113.54,28.07 113.79,27.81 v113.79,27.18
  Top 0.254: v106.43,18.54 107.19,19.3 107.19,23.37 108.46,24.64 109.47,24.64 111.25,26.42 113.03,26.42 v113.79,27.18 | SJ64.2 106.93,9.4 | 106.93,9.4 107.7,10.16 v107.7,11.68 | SJ65.2 SJ66.2 111.16,8.98 | SJ63.2 110.74,9.4 111.16,8.98 | 111.16,8.98 111.16,8.29 110.49,7.62 107.7,7.62 106.93,8.38 106.93,9.4
  Bottom 0.152: v120.27,28.55 120.32,28.5 121.46,28.5 122.12,27.84 U14.12
  Bottom 0.203: v113.79,27.18 117.6,27.18 119.14,28.71 120.1,28.71 v120.27,28.55
  Bottom 0.254: v106.43,18.54 107.7,17.27 v107.7,11.68
1.8V4  (via drill 0.33)
  Top 0.152: U18.12 29.16,72.8 28.5,73.46 27.36,73.46 v27.3,73.51
  Top 0.203: U19.18 20.72,73.43 20.57,73.28 20.57,73.03 20.83,72.77 v20.83,72.14
  Top 0.254: v13.46,63.5 14.22,64.26 14.22,68.33 15.49,69.6 16.51,69.6 18.29,71.37 20.07,71.37 v20.83,72.14 | SJ81.2 13.97,54.36 | 13.97,54.36 14.73,55.12 v14.73,56.64 | SJ82.2 SJ83.2 18.19,53.94 | SJ80.2 17.78,54.36 18.19,53.94 | 18.19,53.94 18.19,53.24 17.53,52.58 14.73,52.58 13.97,53.34 13.97,54.36
  Bottom 0.152: v27.3,73.51 27.36,73.46 28.5,73.46 29.16,72.8 U18.12
  Bottom 0.203: v20.83,72.14 24.64,72.14 26.18,73.67 27.14,73.67 v27.3,73.51
  Bottom 0.254: v13.46,63.5 14.73,62.23 v14.73,56.64
1.8V5  (via drill 0.33)
  Top 0.152: U22.12 60.15,72.8 59.49,73.46 58.34,73.46 v58.29,73.51
  Top 0.203: U23.18 51.71,73.43 51.56,73.28 51.56,73.03 51.82,72.77 v51.82,72.14
  Top 0.254: v44.45,63.5 45.21,64.26 45.21,68.33 46.48,69.6 47.5,69.6 49.28,71.37 51.05,71.37 v51.82,72.14 | SJ98.2 44.96,54.36 | 44.96,54.36 45.72,55.12 v45.72,56.64 | SJ99.2 SJ100.2 49.18,53.94 | SJ97.2 48.77,54.36 49.18,53.94 | 49.18,53.94 49.18,53.24 48.51,52.58 45.72,52.58 44.96,53.34 44.96,54.36
  Bottom 0.152: v58.29,73.51 58.34,73.46 59.49,73.46 60.15,72.8 U22.12
  Bottom 0.203: v51.82,72.14 55.63,72.14 57.16,73.67 58.13,73.67 v58.29,73.51
  Bottom 0.254: v44.45,63.5 45.72,62.23 v45.72,56.64
1.8V6  (via drill 0.33)
  Top 0.152: U26.12 91.14,72.8 90.47,73.46 89.33,73.46 v89.28,73.51
  Top 0.203: U27.18 82.7,73.43 82.55,73.28 82.55,73.03 82.8,72.77 v82.8,72.14